# Altium PCB SE_13.PcbDoc (part 1 of 3)
Units mil, origin at the board's own origin, x right, y up, seen from the top; angles counter-clockwise.
Board outline 3937.01 x 3937.01 mil, 4 copper layers (Top, GND, PWR, Bottom), stack 35.4 mil thick; 269 components, 124 nets, 773 pads, 1135 vias.
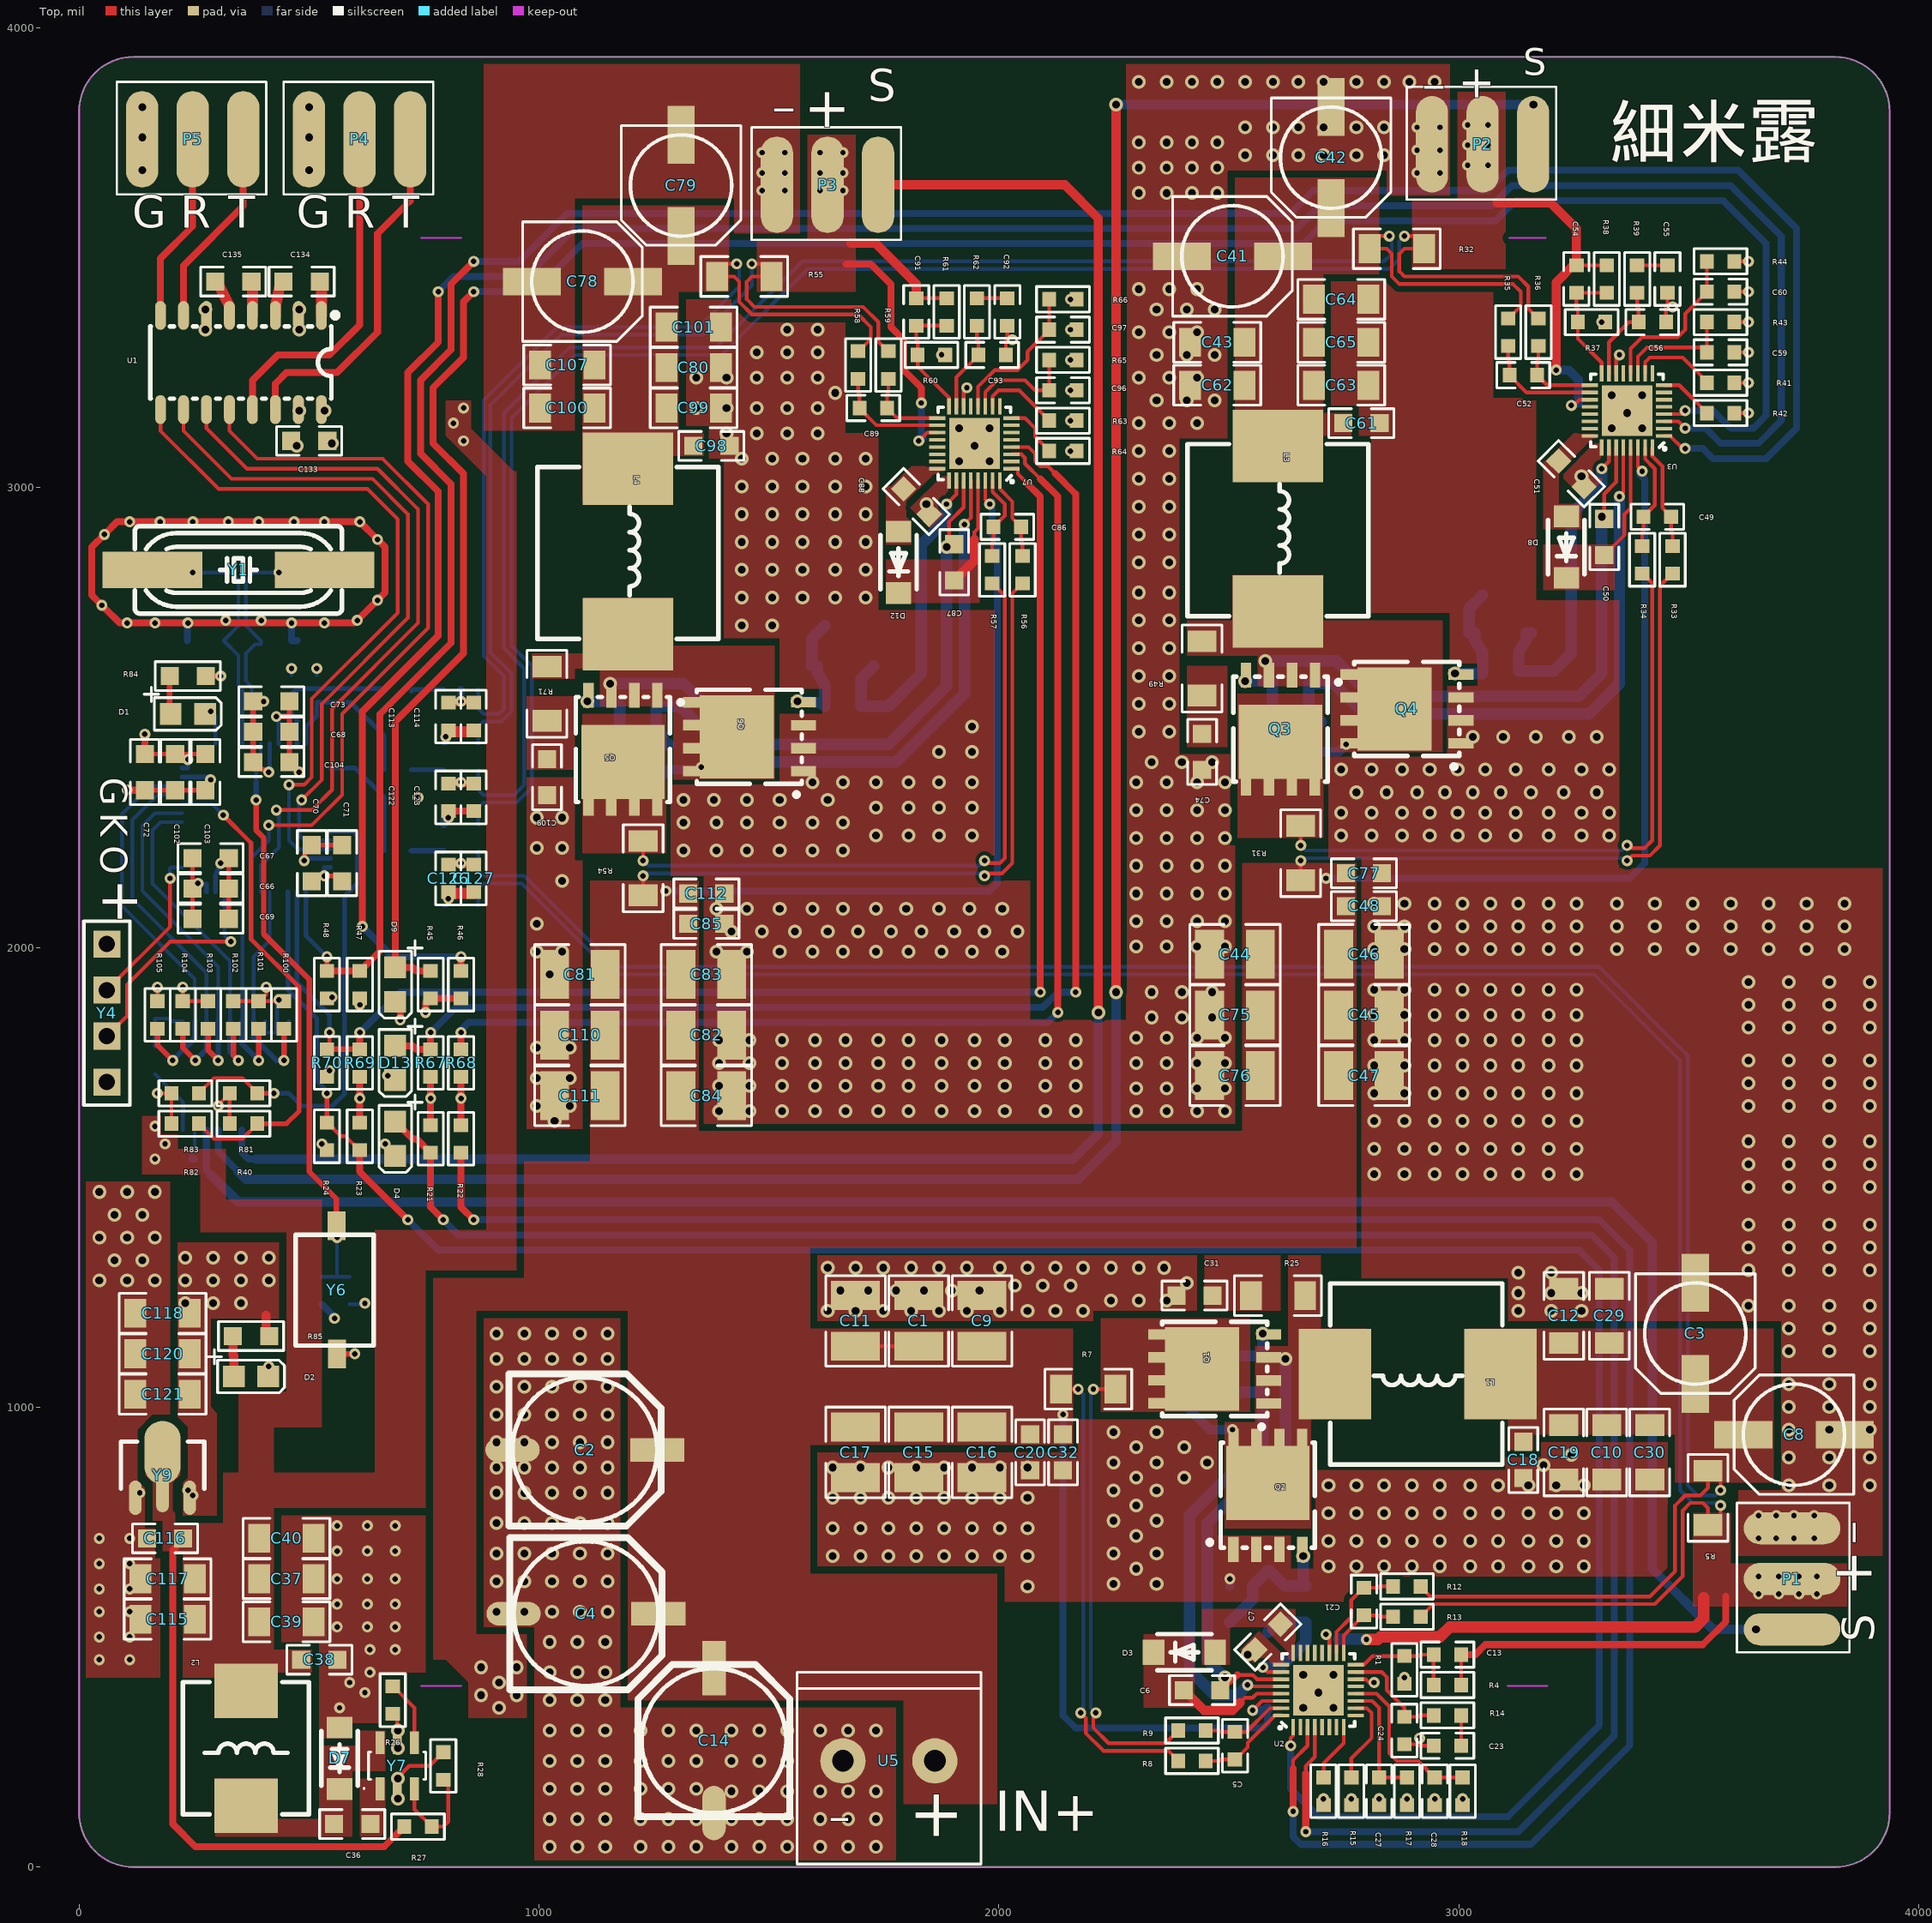
[diagram p0: Top view]
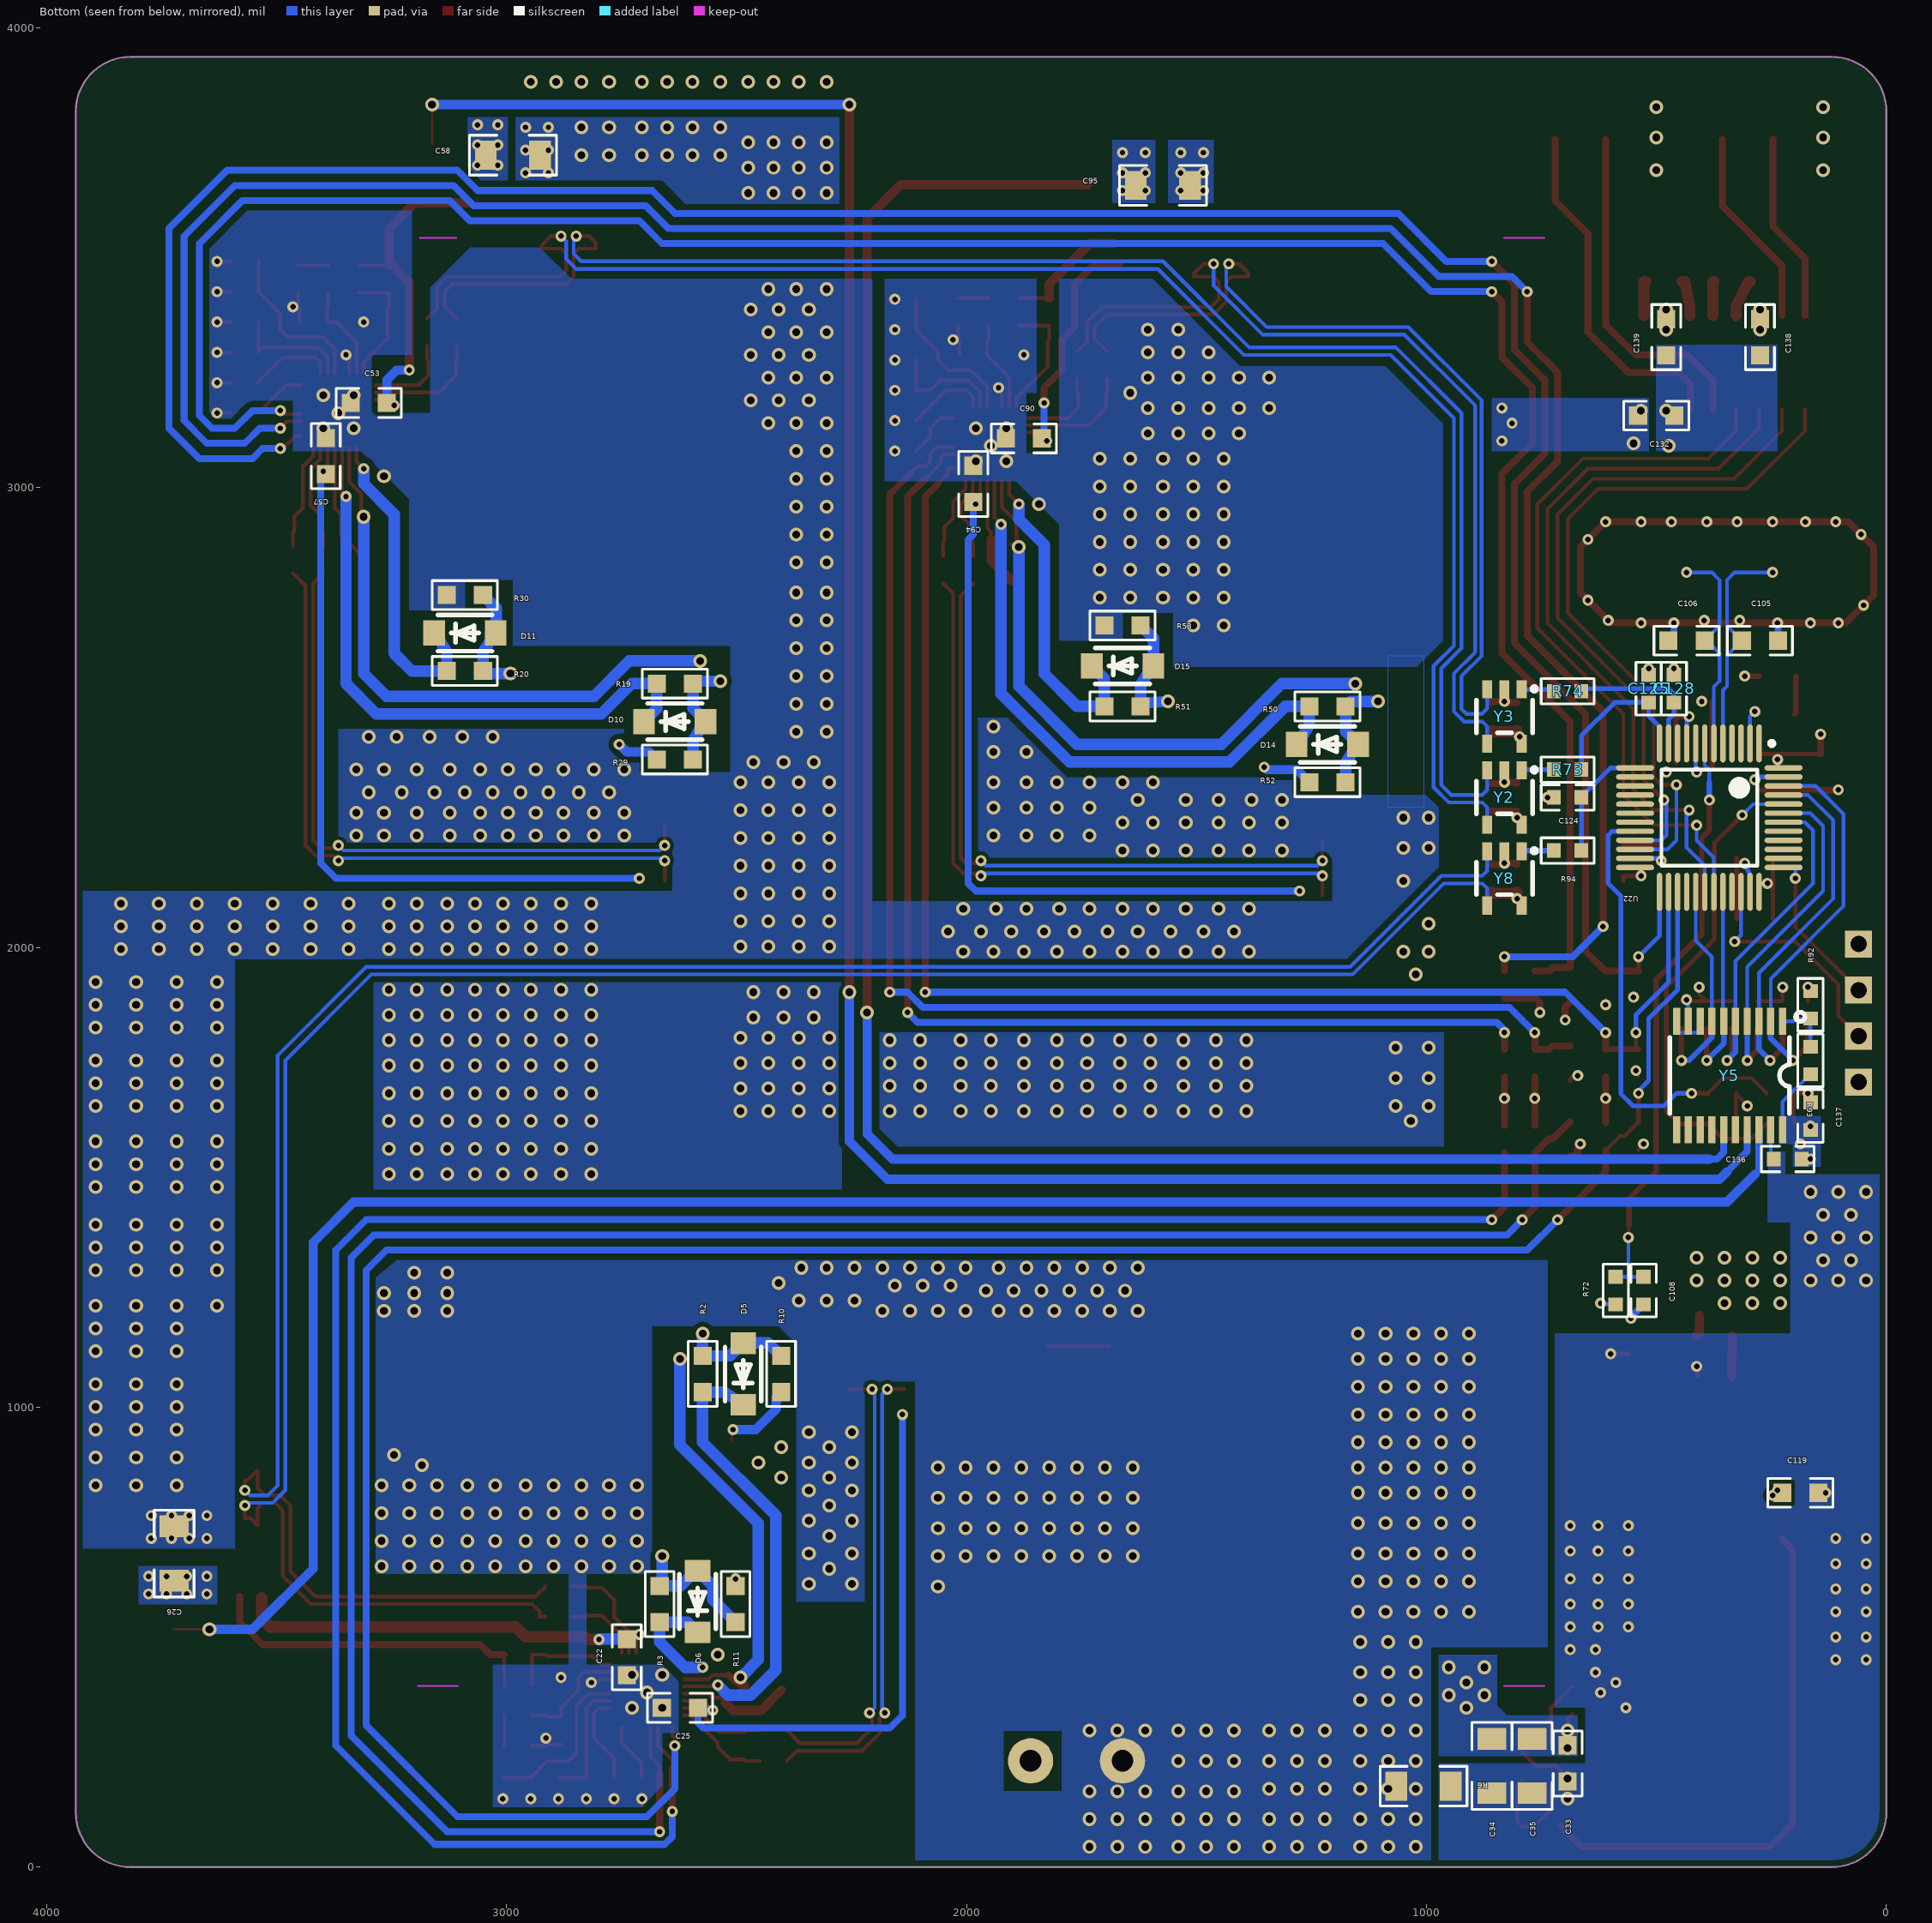
[diagram p1: Bottom view, seen from below]
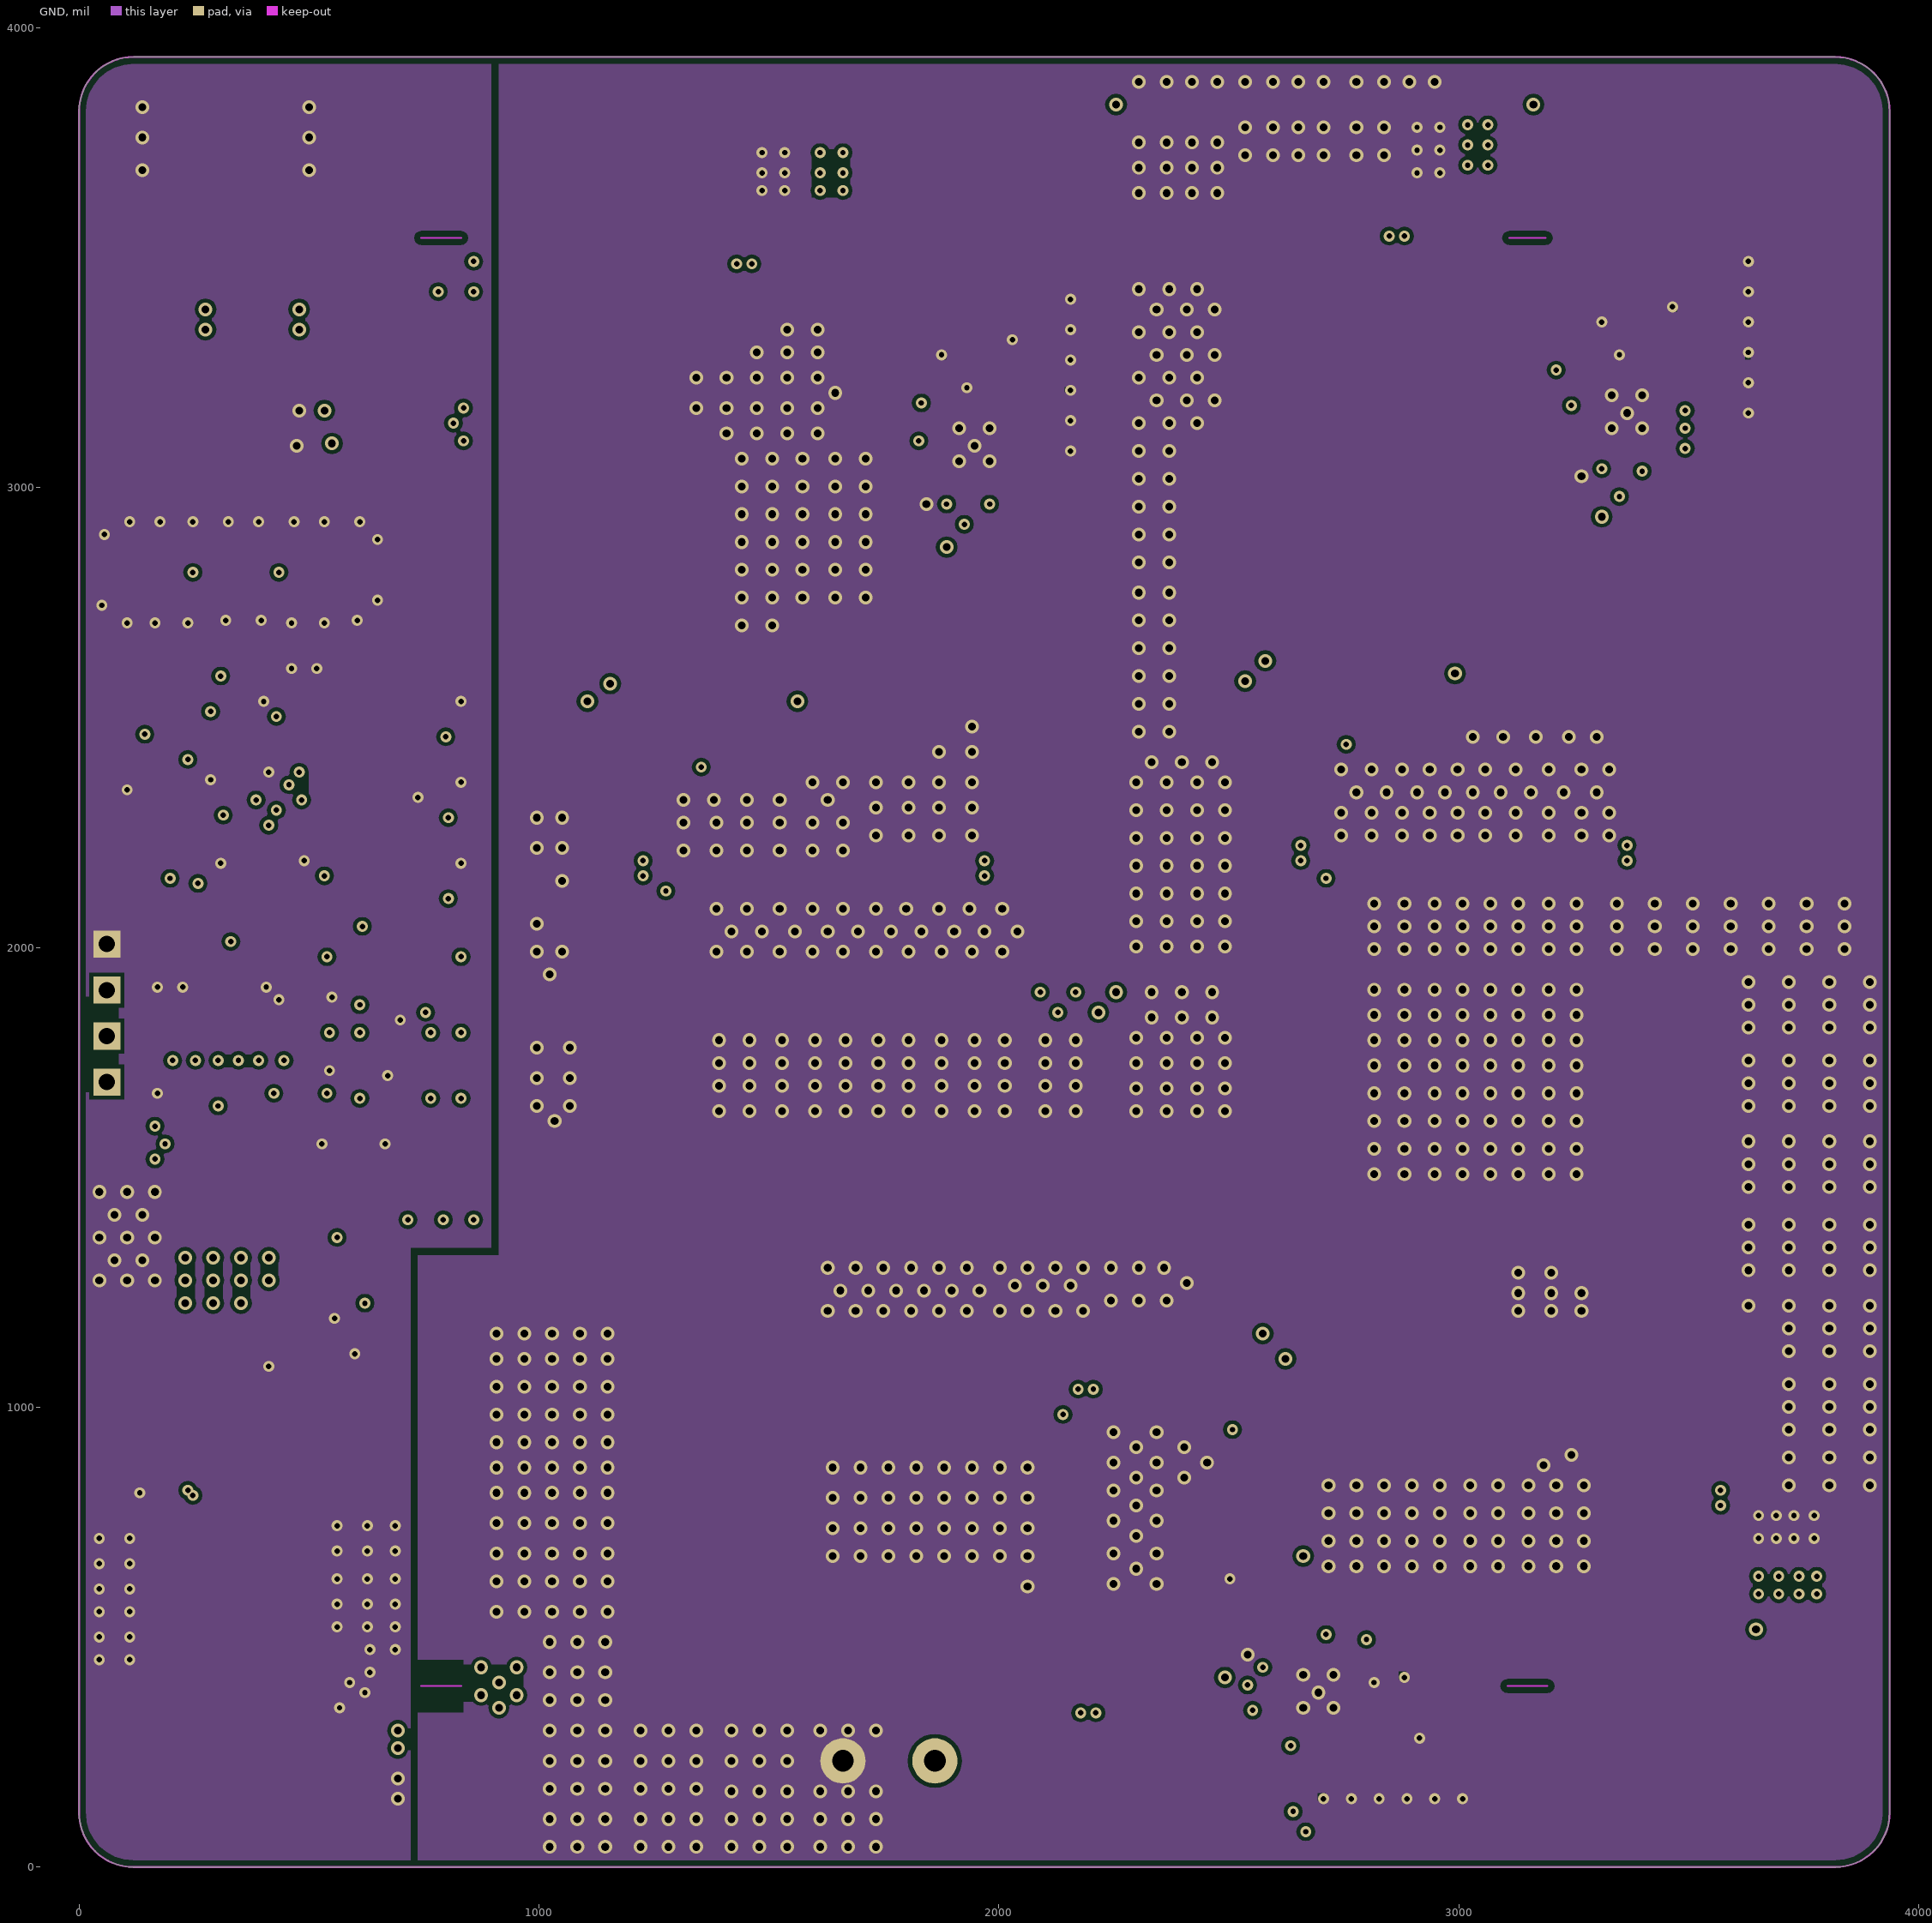
[diagram p2: GND]
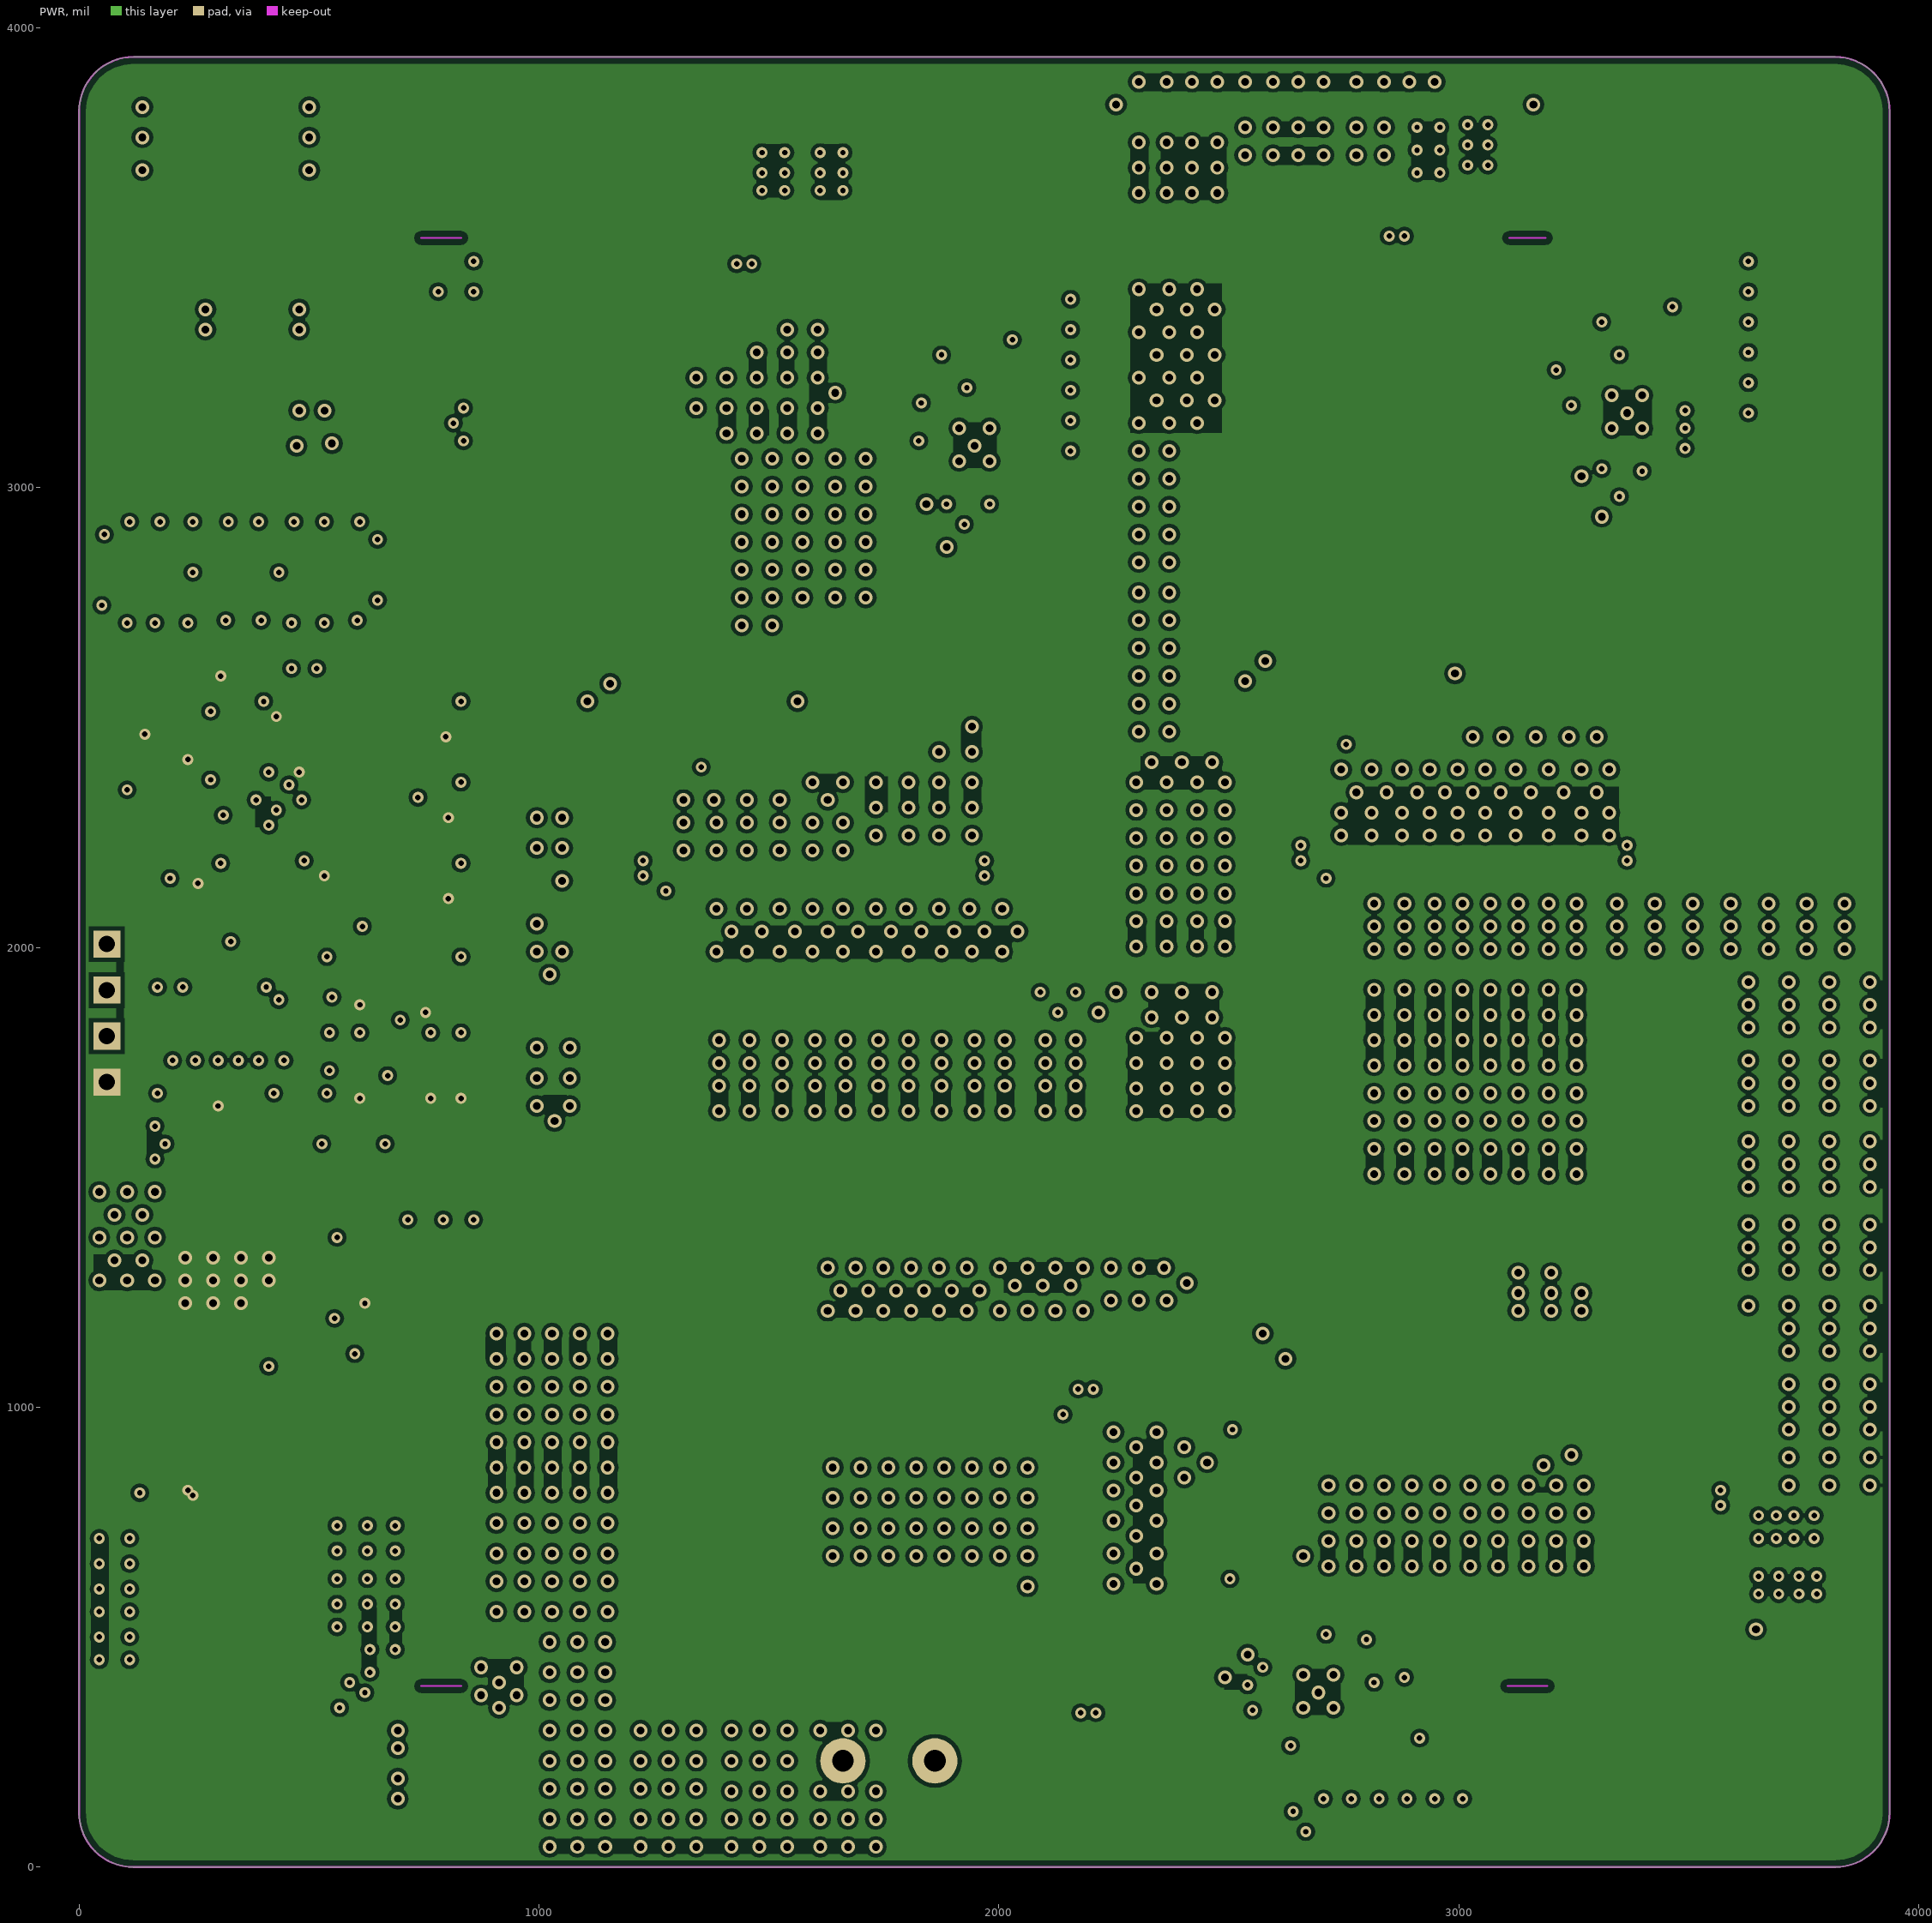
[diagram p3: PWR]

## Layer stack, top to bottom
Solder Mask Top: solder mask 0.4, Solder Resist, Dk 3.5
Top: signal copper 1.35
Dielectric 1: dielectric 10, FR-4, Dk 4.3
GND: signal copper 1.35
Dielectric2: dielectric 10, FR-4, Dk 4.3
PWR: signal copper 1.35
Dielectric3: dielectric 10, FR-4, Dk 4.3
Bottom: signal copper 1.35
Solder Mask Bottom: solder mask 0.4, Solder Resist, Dk 3.5

## Board outline
0,118.11 ccw(c118.11,118.11) 118.11,0 3818.9,0 ccw(c3818.9,118.11) 3937.01,118.11 3937.01,3818.9 ccw(c3818.9,3818.9) 3818.9,3937.01 118.11,3937.01 ccw(c118.11,3818.9) 0,3818.9

## Design rules (kind name [scope] priority, off if disabled: settings)
Clearance "Clearance - Default - DEFAULT- SMD" [IsVia vs IsSMTPin] p1: gap=0 ignorepadtopadclearanceinfootprint=TRUE
Clearance "Clearance - Default - DEFAULT - Via" [IsVia vs IsVia] p2: gap=0 ignorepadtopadclearanceinfootprint=TRUE
Clearance "Clearance - Default - DEFAULT - Net" [All] p3: gap=6 ignorepadtopadclearanceinfootprint=TRUE except(0: Arc-Hole Track-Hole SMDPad-Hole THPad-Hole Via-Hole Fill-Hole Poly-Hole Region-Hole Text-Hole; 8: SMDPad-Fill SMDPad-Poly SMDPad-Region Via-Fill Via-Poly Via-Region; 9: THPad-Fill THPad-Poly THPad-Region; 10: Fill-Fill Fill-Poly Fill-Region Poly-Poly Poly-Region Region-Region Text-Text; 13: Arc-Fill Arc-Poly Arc-Region Track-Fill Track-Poly Track-Region)
ComponentClearance "ComponentClearance - Default - DEFAULT" [All] p1: gap=0 collisioncheckmode=3 verticalgap=10 showdistances=FALSE
HoleToHoleClearance "HoleToHoleClearance - Default - DEFAULT" [All] p1: gap=0 allowstackedmicrovias=TRUE
Length "Default Length" [All] p1: maxlimit=50000 minlimit=0
MaxMinImpedance "Default Impedance" [All] p1: minimum=50.00 maximum=150.0
ParallelSegment "Default Parallel Segment Same Layer" [All] p1: limit=1000 gap=200
ParallelSegment "Default Parallel Segment Adjasent" [All] p2: limit=1000 gap=200
PlaneConnect "Default PlaneConnect" [All] p1: planeconnectstyle=Direct reliefexpansion=20 reliefentries=4 reliefconductorwidth=15 reliefairgap=10
PolygonConnect "PolygonConnect - Default SMT" [IsSMTPin] p1: connectstyle=Direct reliefconductorwidth=10 reliefentries=4 polygonreliefangle="45 Angle" airgapwidth=10
PolygonConnect "PolygonConnect - Default Pad" [All] p2: connectstyle=Direct reliefconductorwidth=15 reliefentries=4 polygonreliefangle="45 Angle" airgapwidth=10
RoutingLayers "RoutingLayers - Default - DEFAULT" [All] p1: top layer_v5=TRUE mid layer 1_v5=TRUE mid layer 2_v5=TRUE bottom layer_v5=TRUE
RoutingPriority "RoutingPriority - Default - DEFAULT" [All] p1: routingpriority=3
RoutingTopology "Default Routing Topology" [All] p1: topology=Shortest
RoutingVias "RoutingVias - Default - DEFAULT" [All] p1: holewidth=12 width=24 viastyle="Through Hole" minholewidth=12 minwidth=24 maxholewidth=12 maxwidth=24
SMDToCorner "SMDToCorner - Default - DEFAULT" [All] p1: distance=0
SolderMaskExpansion "SolderMaskExpansion from CAM settings" [All] p1: expansion=5
Width "Default Width" [All] p1: maxlimit=200 minlimit=4.1 preferedwidth=8
24 further rules are at their usual default settings.

## Components (designator, comment, footprint, x,y, rotation, side; value= is the part's Value field where it differs from the comment)
C1 "1210C" 1210C 1826,1188 r90 top
C2 "CM_E(8_10.2)" CM_E(8_10.2) 1100,907.5 r0 top
C3 "CC6.56.5" CC6.56.5 3514.5,1160.5 r90 top
C4 "CM_E(8_10.2)" CM_E(8_10.2) 1102.36,551.18 r0 top
C5 "0603C" 0603C 2513.5,264 r90 top
C6 "0805C" 0805C 2442,385 r0 top
C7 "0805C" 0805C 2585,500.5 r45 top
C8 "CC6.56.5" CC6.56.5 3729,940.5 r0 top
C9 "1210C" 1210C 1963.5,1188 r90 top
C10 "1206C" 1206C 3322,902 r270 top
C11 "1210C" 1210C 1688.5,1188 r90 top
C12 "1206C" 1206C 3228.5,1199 r90 top
C13 "0603C" 0603C 2975.5,462 r180 top
C14 "CM_E(8_10.2)" CM_E(8_10.2) 1380.5,275 r90 top
C15 "1210C" 1210C 1826,902 r270 top
C16 "1210C" 1210C 1963.5,902 r270 top
C17 "1210C" 1210C 1688.5,902 r270 top
C18 "0805C" 0805C 3140.5,885.5 r270 top
C19 "1206C" 1206C 3228.5,902 r270 top
C20 "0805C" 0805C 2068,902 r270 top
C21 "0603C" 0603C 2794,577.5 r90 top
C22 "0805C" 0805C 2739,456.5 r90 bottom
C23 "0603C" 0603C 2975.5,264 r180 top
C24 "0603C" 0603C 2882,297 r270 top
C25 "0805C" 0805C 2623.5,346.5 r180 bottom
C26 "1206C" 1206C 3723.5,682 r90 bottom
C27 "0603C" 0603C 2827,165 r270 top
C28 "0603C" 0603C 2948,165 r270 top
C29 "1206C" 1206C 3327.5,1199 r90 top
C30 "1206C" 1206C 3415.5,902 r270 top
C31 "0805C" 0805C 2425.5,1243 r180 top
C32 "0805C" 0805C 2139.5,902 r270 top
C33 "0805C" 0805C 693,225.5 r90 bottom
C34 "1206C" 1206C 858,220 r90 bottom
C35 "1206C" 1206C 770,220 r90 bottom
C36 "0805C" 0805C 594,93.5 r0 top
C37 "1206C" 1206C 451,627 r180 top
C38 "0805C" 0805C 522.5,451 r180 top
C39 "1206C" 1206C 451,533.5 r180 top
C40 "1206C" 1206C 451,715 r180 top
C41 "CC6.56.5" CC6.56.5 2508,3503.5 r180 top
C42 "CC6.56.5" CC6.56.5 2722.5,3718 r90 top
C43 "1206C" 1206C 2475,3316.5 r180 top
C44 "1210C" 1210C 2513.5,1985.5 r180 top
C45 "1210C" 1210C 2794,1853.5 r0 top
C46 "1210C" 1210C 2794,1985.5 r0 top
C47 "1210C" 1210C 2794,1721.5 r0 top
C48 "0805C" 0805C 2794,2090 r0 top
C49 "0603C" 0603C 3432,2937 r180 top
C50 "0805C" 0805C 3316.5,2893 r90 top
C51 "0805C" 0805C 3245,3030.5 r135 top
C52 "0603C" 0603C 3140.5,3245 r180 top
C53 "0805C" 0805C 3300,3184.5 r180 bottom
C54 "0603C" 0603C 3256,3454 r270 top
C55 "0603C" 0603C 3454,3454 r270 top
C56 "0603C" 0603C 3421,3360.5 r0 top
C57 "0805C" 0805C 3393.5,3069 r270 bottom
C58 "1206C" 1206C 2986.5,3723.5 r180 bottom
C59 "0603C" 0603C 3569.5,3294.5 r0 top
C60 "0603C" 0603C 3569.5,3426.5 r0 top
C61 "0805C" 0805C 2788.5,3140.5 r0 top
C62 "1206C" 1206C 2475,3223 r180 top
C63 "1206C" 1206C 2744.5,3223 r0 top
C64 "1206C" 1206C 2744.5,3410 r0 top
C65 "1206C" 1206C 2744.5,3316.5 r0 top
C66 "0805C" 0805C 286,2128.5 r0 top
C67 "0805C" 0805C 286,2194.5 r0 top
C68 "0805C" 0805C 418,2469.5 r180 top
C69 "0805C" 0805C 286,2062.5 r0 top
C70 "0805C" 0805C 506,2183.5 r90 top
C71 "0805C" 0805C 572,2183.5 r90 top
C72 "0805C" 0805C 143,2381.5 r270 top
C73 "0805C" 0805C 418,2535.5 r180 top
C74 "0805C" 0805C 2442,2425.5 r270 top
C75 "1210C" 1210C 2513.5,1853.5 r180 top
C76 "1210C" 1210C 2513.5,1721.5 r180 top
C77 "0805C" 0805C 2794,2161.5 r0 top
C78 "CC6.56.5" CC6.56.5 1094.5,3448.5 r180 top
C79 "CC6.56.5" CC6.56.5 1309,3657.5 r90 top
C80 "1206C" 1206C 1336.5,3261.5 r0 top
C81 "1210C" 1210C 1089,1941.5 r180 top
C82 "1210C" 1210C 1364,1809.5 r0 top
C83 "1210C" 1210C 1364,1941.5 r0 top
C84 "1210C" 1210C 1364,1677.5 r0 top
C85 "0805C" 0805C 1364,2051.5 r0 top
C86 "0603C" 0603C 2018.5,2915 r180 top
C87 "0805C" 0805C 1903,2838 r90 top
C88 "0805C" 0805C 1820.5,2970 r135 top
C89 "0603C" 0603C 1727,3173.5 r180 top
C90 "0805C" 0805C 1875.5,3107.5 r180 bottom
C91 "0603C" 0603C 1820.5,3382.5 r270 top
C92 "0603C" 0603C 2018.5,3382.5 r270 top
C93 "0603C" 0603C 1985.5,3289 r0 top
C94 "0805C" 0805C 1985.5,3008.5 r270 bottom
C95 "1206C" 1206C 1573,3657.5 r180 bottom
C96 "0603C" 0603C 2139.5,3212 r0 top
C97 "0603C" 0603C 2139.5,3344 r0 top
C98 "0805C" 0805C 1375,3091 r0 top
C99 "1206C" 1206C 1336.5,3173.5 r0 top
C100 "1206C" 1206C 1061.5,3173.5 r180 top
C101 "1206C" 1206C 1336.5,3349.5 r0 top
C102 "0805C" 0805C 209,2381.5 r270 top
C103 "0805C" 0805C 275,2381.5 r270 top
C104 "0805C" 0805C 418,2403.5 r180 top
C105 "0805C" 0805C 275,2667.5 r0 bottom
C106 "0805C" 0805C 434.5,2667.5 r180 bottom
C107 "1206C" 1206C 1061.5,3267 r180 top
C108 "0603C" 0603C 528,1254 r270 bottom
C109 "0805C" 0805C 1017.5,2370.5 r270 top
C110 "1210C" 1210C 1089,1809.5 r180 top
C111 "1210C" 1210C 1089,1677.5 r180 top
C112 "0805C" 0805C 1364,2117.5 r0 top
C113 "0603C" 0603C 803,2502.5 r270 top
C114 "0603C" 0603C 858,2502.5 r270 top
C115 "1206C" 1206C 192.5,539 r0 top
C116 "0805C" 0805C 187,715 r0 top
C117 "1206C" 1206C 192.5,627 r0 top
C118 "1206C" 1206C 181.5,1204.5 r0 top
C119 "0805C" 0805C 187,814 r0 bottom
C120 "1206C" 1206C 181.5,1116.5 r0 top
C121 "1206C" 1206C 181.5,1028.5 r0 top
C122 "0603C" 0603C 803,2326.5 r270 top
C123 "0603C" 0603C 858,2326.5 r270 top
C124 "0603C" 0603C 693,2326.5 r180 bottom
C125 "0603C" 0603C 517,2563 r270 bottom
C126 "0603C" 0603C 803,2150.5 r270 top
C127 "0603C" 0603C 858,2150.5 r270 top
C128 "0603C" 0603C 462,2563 r270 bottom
C132 "0805C" 0805C 500.5,3157 r180 bottom
C133 "0805C" 0805C 500.5,3102 r180 top
C134 "0805C" 0805C 484,3448.5 r180 top
C135 "0805C" 0805C 335.5,3448.5 r180 top
C136 "0603C" 0603C 214.5,1540 r180 bottom
C137 "0603C" 0603C 165,1633.5 r270 bottom
C138 "0805C" 0805C 275,3327.5 r270 bottom
C139 "0805C" 0805C 478.5,3327.5 r270 bottom
D1 "0805D" 0805D 236.5,2508 r0 top
D2 "0805D" 0805D 374,1067 r0 top
D3 "SOD-123_L2.8-W1.8-LS3.7-RD" SOD-123_L2.8-W1.8-LS3.7-RD 2403.5,467.5 r0 top
D4 "0805D" 0805D 687.5,1584 r270 top
D5 "SOD-123_L2.8-W1.8-LS3.7-RD" SOD-123_L2.8-W1.8-LS3.7-RD 2486,1072.5 r90 bottom
D6 "SOD-123_L2.8-W1.8-LS3.7-RD" SOD-123_L2.8-W1.8-LS3.7-RD 2585,577.5 r90 bottom
D7 "SOD-123_L2.8-W1.8-LS3.7-RD" SOD-123_L2.8-W1.8-LS3.7-RD 566.5,236.5 r90 top
D8 "SOD-123_L2.8-W1.8-LS3.7-RD" SOD-123_L2.8-W1.8-LS3.7-RD 3234,2871 r90 top
D9 "0805D" 0805D 687.5,1919.5 r270 top
D10 "SOD-123_L2.8-W1.8-LS3.7-RD" SOD-123_L2.8-W1.8-LS3.7-RD 2634.5,2491.5 r180 bottom
D11 "SOD-123_L2.8-W1.8-LS3.7-RD" SOD-123_L2.8-W1.8-LS3.7-RD 3091,2684 r180 bottom
D12 "SOD-123_L2.8-W1.8-LS3.7-RD" SOD-123_L2.8-W1.8-LS3.7-RD 1782,2838 r90 top
D13 "0805D" 0805D 687.5,1749 r270 top
D14 "SOD-123_L2.8-W1.8-LS3.7-RD" SOD-123_L2.8-W1.8-LS3.7-RD 1215.5,2442 r180 bottom
D15 "SOD-123_L2.8-W1.8-LS3.7-RD" SOD-123_L2.8-W1.8-LS3.7-RD 1661,2612.5 r180 bottom
L1 "1040L" 1040L 3091,1072.5 r180 top
L2 "L-SMD-0630" L-SMD-0630 363,258.5 r90 top
L3 "1040L" 1040L 2607,3091 r270 top
L4 "1040L" 1040L 1193.5,3041.5 r270 top
P1 "POST_3" POST_3 3850,797 r180 top
P2 "POST_3" POST_3 2882,3872 r270 top
P3 "POST_3" POST_3 1457.5,3784 r270 top
P4 "POST_3" POST_3 440,3883 r270 top
P5 "POST_3" POST_3 77,3883 r270 top
Q1 "DFN-8_5X6" DFN-8_5X6 2469.5,1083.5 r90 top
Q2 "DFN-8_5X6" DFN-8_5X6 2585,808.5 r0 top
Q3 "DFN-8_5X6" DFN-8_5X6 2612.5,2475 r180 top
Q4 "DFN-8_5X6" DFN-8_5X6 2887.5,2519 r90 top
Q5 "DFN-8_5X6" DFN-8_5X6 1182.5,2431 r180 top
Q6 "DFN-8_5X6" DFN-8_5X6 1457.5,2458.5 r90 top
R1 "0603R" 0603R 2882,429 r90 top
R2 "0805R" 0805R 2574,1072.5 r90 bottom
R3 "0805R" 0805R 2667.5,572 r90 bottom
R4 "0603R" 0603R 2975.5,396 r0 top
R5 "1206C" 1206C 3542,803 r270 top
R6 "1206C" 1206C 1006.5,176 r0 bottom
R7 "1206C" 1206C 2194.5,1039.5 r180 top
R8 "0603R" 0603R 2420,231 r180 top
R9 "0603R" 0603R 2420,297 r180 top
R10 "0805R" 0805R 2403.5,1072.5 r270 bottom
R11 "0805R" 0805R 2502.5,572 r270 bottom
R12 "0603R" 0603R 2887.5,610.5 r180 top
R13 "0603R" 0603R 2887.5,544.5 r180 top
R14 "0603R" 0603R 2975.5,330 r180 top
R15 "0603R" 0603R 2766.5,165 r90 top
R16 "0603R" 0603R 2706,165 r90 top
R17 "0603R" 0603R 2887.5,165 r90 top
R18 "0603R" 0603R 3008.5,165 r90 top
R19 "0805R" 0805R 2634.5,2574 r180 bottom
R20 "0805R" 0805R 3091,2601.5 r180 bottom
R21 "0603R" 0603R 764.5,1584 r90 top
R22 "0603R" 0603R 830.5,1584 r90 top
R23 "0603R" 0603R 610.5,1589.5 r90 top
R24 "0603R" 0603R 539,1589.5 r90 top
R25 "1206C" 1206C 2607,1243 r180 top
R26 "0603R" 0603R 682,363 r90 top
R27 "0603R" 0603R 737,88 r0 top
R28 "0603R" 0603R 792,220 r270 top
R29 "0805R" 0805R 2634.5,2409 r0 bottom
R30 "0805R" 0805R 3091,2766.5 r180 bottom
R31 "1206C" 1206C 2656.5,2205.5 r270 top
R32 "1206C" 1206C 2865.5,3520 r0 top
R33 "0603R" 0603R 3465,2843.5 r270 top
R34 "0603R" 0603R 3399,2843.5 r270 top
R35 "0603R" 0603R 3107.5,3338.5 r270 top
R36 "0603R" 0603R 3173.5,3338.5 r270 top
R37 "0603R" 0603R 3289,3360.5 r180 top
R38 "0603R" 0603R 3322,3454 r90 top
R39 "0603R" 0603R 3388,3454 r270 top
R40 "0603R" 0603R 357.5,1617 r180 top
R41 "0603R" 0603R 3569.5,3228.5 r180 top
R42 "0603R" 0603R 3569.5,3162.5 r180 top
R43 "0603R" 0603R 3569.5,3360.5 r180 top
R44 "0603R" 0603R 3569.5,3492.5 r180 top
R45 "0603R" 0603R 764.5,1919.5 r270 top
R46 "0603R" 0603R 830.5,1919.5 r270 top
R47 "0603R" 0603R 610.5,1919.5 r270 top
R48 "0603R" 0603R 539,1919.5 r90 top
R49 "1206C" 1206C 2442,2607 r270 top
R50 "0805R" 0805R 1215.5,2524.5 r180 bottom
R51 "0805R" 0805R 1661,2524.5 r180 bottom
R52 "0805R" 0805R 1215.5,2359.5 r0 bottom
R53 "0805R" 0805R 1661,2700.5 r180 bottom
R54 "1206C" 1206C 1226.5,2172.5 r270 top
R55 "1206C" 1206C 1446.5,3459.5 r0 top
R56 "0603R" 0603R 2051.5,2821.5 r270 top
R57 "0603R" 0603R 1985.5,2821.5 r270 top
R58 "0603R" 0603R 1694,3267 r270 top
R59 "0603R" 0603R 1760,3267 r270 top
R60 "0603R" 0603R 1853.5,3289 r180 top
R61 "0603R" 0603R 1886.5,3382.5 r90 top
R62 "0603R" 0603R 1952.5,3382.5 r270 top
R63 "0603R" 0603R 2139.5,3146 r180 top
R64 "0603R" 0603R 2139.5,3080 r180 top
R65 "0603R" 0603R 2139.5,3278 r180 top
R66 "0603R" 0603R 2139.5,3410 r180 top
R67 "0603R" 0603R 764.5,1749 r270 top
R68 "0603R" 0603R 830.5,1749 r270 top
R69 "0603R" 0603R 610.5,1749 r270 top
R70 "0603R" 0603R 539,1749 r90 top
R71 "1206C" 1206C 1017.5,2552 r270 top
R72 "0603R" 0603R 588.5,1254 r90 bottom
R73 "0603R" 0603R 693,2387 r180 bottom
R74 "0603R" 0603R 693,2557.5 r180 bottom
R81 "0603R" 0603R 357.5,1683 r180 top
R82 "0603R" 0603R 231,1617 r0 top
R83 "0603R" 0603R 231,1683 r0 top
R84 "0805R" 0805R 236.5,2590.5 r0 top
R85 "0805R" 0805R 374,1155 r0 top
R92 "0603R" 0603R 165,1875.5 r270 bottom
R93 "0603R" 0603R 165,1754.5 r90 bottom
R94 "0603R" 0603R 693,2211 r180 bottom
R100 "0603R" 0603R 445.5,1853.5 r270 top
R101 "0603R" 0603R 390.5,1853.5 r270 top
R102 "0603R" 0603R 335.5,1853.5 r270 top
R103 "0603R" 0603R 280.5,1853.5 r270 top
R104 "0603R" 0603R 225.5,1853.5 r270 top
R105 "0603R" 0603R 170.5,1853.5 r270 top
U1 "SOP-16_L9.9-W3.9-P1.27-LS6.1-BL" SOP-16_L9.9-W3.9-P1.27-LS6.1-BL 352,3272.5 r180 top
U2 "QFN-32_L4.0-W4.0-P0.40-BL-EP2.7" QFN-32_L4.0-W4.0-P0.40-BL-EP2.7 2695,385 r0 top
U3 "QFN-32_L4.0-W4.0-P0.40-BL-EP2.7" QFN-32_L4.0-W4.0-P0.40-BL-EP2.7 3366,3168 r90 top
U5 "KF127_2" KF127_2 1661,231 r0 top
U7 "QFN-32_L4.0-W4.0-P0.40-BL-EP2.7" QFN-32_L4.0-W4.0-P0.40-BL-EP2.7 1947,3096.5 r90 top
U22 "LQFP-48_M" LQFP-48_M 385,2282.5 r270 bottom
Y1 "HC-49S_L11.4-W4.8" HC-49S_L11.4-W4.8 346.5,2821.5 r180 top
Y2 "SOT-23-5_L3.0-W1.7-P0.95-LS2.8-BL" SOT-23-5_L3.0-W1.7-P0.95-LS2.8-BL 830.5,2326.5 r0 bottom
Y3 "SOT-23-5_L3.0-W1.7-P0.95-LS2.8-BL" SOT-23-5_L3.0-W1.7-P0.95-LS2.8-BL 830.5,2502.5 r0 bottom
Y4 "HDR1X4" HDR1X4 60.5,2007.5 r270 top
Y5 "TSSOP-20_L6.5-W4.4-P0.65-LS6.4-BL" TSSOP-20_L6.5-W4.4-P0.65-LS6.4-BL 341,1721.5 r0 bottom
Y6 "KEY_3_6_2.5" KEY_3_6_2.5 473,1375 r270 top
Y7 "SOT-23-6" SOT-23-6 654.5,170.5 r90 top
Y8 "SOT-23-5_L3.0-W1.7-P0.95-LS2.8-BL" SOT-23-5_L3.0-W1.7-P0.95-LS2.8-BL 830.5,2150.5 r0 bottom
Y9 "SOT-89-3_L4.5-W2.5-P1.50-LS4.2-BR" SOT-89-3_L4.5-W2.5-P1.50-LS4.2-BR 181.5,852.5 r270 top

## Footprints (in the part's own frame and the unit in brackets; to place one, negate y for a bottom-side part, rotate by r counter-clockwise, add the part's x,y. Pads: shape width x height; smd on the part's side, far side on the other; paste and mask are expansions set on the pad)
0603C [mil]
  rect 29.92x31.5 smd: 1(-29.92,0) 2(29.92,0)
  silkscreen extent -57,-28 57,28
0603R [mil]
  rect 29.92x31.5 smd: 1(-29.92,0) 2(29.92,0)
  silkscreen extent -57,-28 57,28
0805C [mm]
  rect 1x1 smd: 1(-1,0) 2(1,0)
  silkscreen extent -1.8,-0.8 1.8,0.8
0805D [mil]
  rect 47.24x47.24 smd: A(-37.4,0) K(37.4,0)
  silkscreen extent -95,-35 73,59
0805R [mm]
  rect 1x1 smd: 1(-1,0) 2(1,0)
  silkscreen extent -1.8,-0.8 1.8,0.8
1040L [mm]
  rect 4x5 smd: 1(9.144,0) 2(0,0)
  silkscreen extent -0.1,-5 9.4,5
1206C [mil]
  rect 47.24x62.99 smd: 1(-59.06,0) 2(59.06,0)
  silkscreen extent -94,-43 94,43
1210C [mm]
  rect 1.6x2.7 smd: 1(-1.4,0) 2(1.4,0)
  silkscreen extent -2.5,-1.65 2.5,1.65
CC6.56.5 [mil]
  rect 125.98x59.06 smd: 1(-110,0) 2(110.24,0)
  silkscreen extent -130,-130 130,130
CM_E(8_10.2) [mm]
  rect 3x1.3 smd: 1(4,0)
  oval 3x1.3 smd: 2(-4,0)
  silkscreen extent -4.2,-4.2 4.2,4.2
DFN-8_5X6 [mm]
  rect 0.58x1.38 smd: 1(-1.905,-2.985) 2(-0.635,-2.985) 3(0.635,-2.985) 4(1.905,-2.985) 5(1.9,2.985) 6(0.64,2.985) 7(-0.63,2.985) 8(-1.9,2.985)
  rect 4.6x4.1 smd: 9(0,0.695)
  silkscreen extent -3.2,-2.89 2.6,2.9
HC-49S_L11.4-W4.8 [mm]
  rect 5.5x2 smd: 1(-4.75,0) 2(4.75,0)
  silkscreen extent -5.71,-2.41 5.71,2.41
HDR1X4 [mil]
  rect 59.06x59.06 hole 35.43: 1(0,0) 2(100,0) 3(200,0) 4(300,0)
  silkscreen extent -50,-50 350,50
KEY_3_6_2.5 [mm]
  rect 1.6x1 smd: 1(-0.5,2.2) 2(6.578,2.232)
  silkscreen extent 0,-0.05 6.11,4.26
KF127_2 [mm]
  round 2.5 hole 1.2: 1(0,0) 2(5.08,0)
  silkscreen extent -2.54,-5.7 7.62,4.9
L-SMD-0630 [mm]
  rect 3x3.5 smd: 1(-3.175,0) 2(3.175,0)
  silkscreen extent -3.66,-3.48 3.66,3.48
LQFP-48_M [mil]
  oval 82.68x11.81 smd: 1(-161.42,108.27) 2(-161.42,88.58) 3(-161.42,68.9) 4(-161.42,49.21) 5(-161.42,29.53) 6(-161.42,9.84) 7(-161.42,-9.84) 8(-161.42,-29.53) 9(-161.42,-49.21) 10(-161.42,-68.9) 11(-161.42,-88.58) 12(-161.42,-108.27) 25(161.42,-108.27) 26(161.42,-88.58) 27(161.42,-68.9) 28(161.42,-49.21) 29(161.42,-29.53) 30(161.42,-9.84) 31(161.42,9.84) 32(161.42,29.53) 33(161.42,49.21) 34(161.42,68.9) 35(161.42,88.58) 36(161.42,108.27)
  oval 11.81x82.68 smd: 13(-108.27,-161.42) 14(-88.58,-161.42) 15(-68.9,-161.42) 16(-49.21,-161.42) 17(-29.53,-161.42) 18(-9.84,-161.42) 19(9.84,-161.42) 20(29.53,-161.42) 21(49.21,-161.42) 22(68.9,-161.42) 23(88.58,-161.42) 24(108.27,-161.42) 37(108.27,161.42) 38(88.58,161.42) 39(68.9,161.42) 40(49.21,161.42) 41(29.53,161.42) 42(9.84,161.42) 43(-9.84,161.42) 44(-29.53,161.42) 45(-49.21,161.42) 46(-68.9,161.42) 47(-88.58,161.42) 48(-108.27,161.42)
  silkscreen extent -166,-104 104,141
POST_3 [mil]
  oval 210x70 smd: 1(125,280) 2(125,170) 3(125,60)
  silkscreen extent 0,5 245,330
QFN-32_L4.0-W4.0-P0.40-BL-EP2.7 [mm]
  rect 0.2x0.9 smd: 1(-1.4,-2.05) 2(-1,-2.05) 3(-0.6,-2.05) 4(-0.2,-2.05) 5(0.2,-2.05) 6(0.6,-2.05) 7(1,-2.05) 8(1.4,-2.05) 17(1.4,2.05) 18(1,2.05) 19(0.6,2.05) 20(0.2,2.05) 21(-0.2,2.05) 22(-0.6,2.05) 23(-1,2.05) 24(-1.4,2.05)
  rect 0.9x0.2 smd: 9(2.05,-1.4) 10(2.05,-1) 11(2.05,-0.6) 12(2.05,-0.2) 13(2.05,0.2) 14(2.05,0.6) 15(2.05,1) 16(2.05,1.4) 25(-2.05,1.4) 26(-2.05,1) 27(-2.05,0.6) 28(-2.05,0.2) 29(-2.05,-0.2) 30(-2.05,-0.6) 31(-2.05,-1) 32(-2.05,-1.4)
  rect 2.8x2.8 smd: 33(0,0)
  silkscreen extent -2.17,-2.14 2,2
SOD-123_L2.8-W1.8-LS3.7-RD [mm]
  rect 1.2x1.4 smd: 1(-1.7,0) 2(1.7,0)
  silkscreen extent -1.5,-1 1.5,1
SOP-16_L9.9-W3.9-P1.27-LS6.1-BL [mm]
  oval 0.6x1.598 smd: 1(-4.445,-2.6) 2(-3.175,-2.6) 3(-1.905,-2.6) 4(-0.635,-2.6) 5(0.635,-2.6) 6(1.905,-2.6) 7(3.175,-2.6) 8(4.445,-2.6) 9(4.445,2.6) 10(3.175,2.6) 11(1.905,2.6) 12(0.635,2.6) 13(-0.635,2.6) 14(-1.905,2.6) 15(-3.175,2.6) 16(-4.445,2.6)
  silkscreen extent -5.36,-2.76 5,2
SOT-23-5_L3.0-W1.7-P0.95-LS2.8-BL [mm]
  rect 0.55x1 smd: 1(-0.95,-1.5) 2(0,-1.5) 3(0.95,-1.5) 4(0.95,1.5) 5(-0.95,1.5)
  silkscreen extent -1.78,-1.65 1.55,0.9
SOT-23-6 [mil]
  rect 50x20 smd: 1(0,0) 2(0,-37.4) 3(0,-74.8) 4(100,-74.8) 5(100,-37.4) 6(100,0)
  silkscreen extent 0,-99 80,35
SOT-89-3_L4.5-W2.5-P1.50-LS4.2-BR [mm]
  oval 1.9x0.7 smd: 1(1.25,-1.501) 3(1.25,1.501)
  oval 2.1x0.7 smd: 2(1,0)
  oval 3.5x2 smd: 4(-1.25,0)
  silkscreen extent -1.85,-2.3 0.75,2.3
TSSOP-20_L6.5-W4.4-P0.65-LS6.4-BL [mil]
  rect 15.74x58.8 smd: 1(-115.16,-118.16) 2(-89.56,-118.15) 3(-63.97,-118.15) 4(-38.38,-118.15) 5(-12.8,-118.15) 6(12.74,-118.15) 7(38.38,-118.15) 8(63.97,-118.15) 9(89.56,-118.15) 10(115.15,-118.15) 11(115.16,118.15) 12(89.57,118.15) 13(63.98,118.15) 14(38.39,118.15) 15(12.8,118.15) 16(-12.79,118.15) 17(-38.38,118.15) 18(-63.97,117.95) 19(-89.56,117.95) 20(-115.16,118.15)
  silkscreen extent -164,-138 130,83

## Via types
v1: diameter 30, hole 17, Top to Bottom, 881 vias
v2: diameter 24, hole 12, Top to Bottom, 254 vias

## Nets (pads, with @x,y where several pads share a name; then routed paths per layer and width w, separated by ;. In a path a pad name is that pad's centre, name@x,y a point inside that pad or via, vN(x,y) a via of type N, cw(c..) or ccw(c..) an arc to the next point about the centre after c; other vN are vias at no path point)
$$$4956: R92.2 R93.2 Y5.1 | length 124.5
  Bottom w8: R93.2@165,1784.42 R92.2@165,1845.58 196.4,1845.58 202.32,1839.66 Y5.1@225.84,1839.66
$$$5503: R94.1 Y8.1 | length 71.6
  Bottom w12: R94.1@722.92,2211 793.1,2211 Y8.1@793.1,2209.55
$$$12524: R73.1 Y2.1 | length 70.8
  Bottom w10: R73.1@722.92,2387 791.65,2387 Y2.1@793.1,2385.55
$$$12529: R74.1 Y3.1 | length 71.9
  Bottom w10: R74.1@722.92,2557.5 726.97,2561.55 Y3.1@793.1,2561.55
$$$19847: C5.2 R9.1 U2.31 | length 187.1
  Top w8: R9.1@2449.92,297 2479.77,297 2482.85,293.92 C5.2@2513.5,293.92 2537.92,293.92 2589.62,345.62 U2.31@2614.29,345.62
$$$19849: C5.1 R8.1 U2.32 | length 210.9
  Top w8: R8.1@2449.92,231 2480.5,231 2483.58,234.08 C5.1@2513.5,234.08 2514.29,234.08 2541,260.79 2541,270.37 2600.51,329.89 U2.32@2614.29,329.89
$$$20041: C6.1 D3.1 U2.29 | length 244.9
  Top w8: 2524.5,357.5 2535.5,368.5 2552,368.5 2560.62,377.12 U2.29@2614.29,377.12
  Top w20: C6.1@2402.63,385 2446.63,341 2508,341 2524.5,357.5
$$$22283: C21.2 R12.2 U2.18 | length 231.7
  Top w8: U2.18@2734.37,465.71 2734.37,511.5 2766.5,543.63 2766.5,580.71 2793.21,607.42 C21.2@2794,607.42 2824.65,607.42 2827.73,610.5 R12.2@2857.58,610.5
$$$22286: C21.1 R13.2 U2.17 | length 181.7
  Top w8: U2.17@2750.12,482.49 U2.17@2750.12,465.71 2750.12,503.7 C21.1@2794,547.58 2824.65,547.58 2827.73,544.5 R13.2@2857.58,544.5
$$$22620: C23.1 R14.1 | length 66
  Top w8: C23.1@3005.42,264 R14.1@3005.42,330
$$$25660: C31.1 R25.2
$$$27242: Q1.5 Q1.6 Q1.7 Q1.8 Q1.9 R7.1 R9.2 | length 1003.8
  Top w8: v2(2205.5,1039.5) R7.1@2253.56,1039.5 ; v2(2211,335.5) 2205.5,330 2205.5,302.5 2238.5,269.5 2362.58,269.5 R9.2@2390.08,297
  Bottom w8: v2(2205.5,1039.5) 2200,1034 2200,346.5 v2(2211,335.5)
$$$28569: R26.2 Y7.4 | length 142.5
  Top w8: R26.2@682,392.92 682.79,392.92 729.3,346.41 Y7.4@729.3,270.5
$$$28597: C36.2 Y7.1
$$$28599: C36.1 D7.1 L2.1 Y7.6
$$$28680: R27.2 R28.2 Y7.3 | length 234.4
  Top w8: Y7.3@729.3,170.5 729.3,125.62 R27.2@766.92,88 792,88 803,99 803,179.08 R28.2@792,190.08
$$$29538: D4.A R21.1 U2.4 | length 4875.4
  Top w8: 2667.5,203.5 2667.5,219.69 2673,225.5 2687.12,239.62 U2.4@2687.12,304.29
  Top w15: D4.A@687.5,1621.4 725.49,1583.41 734.38,1583.41 763.71,1554.08 R21.1@764.5,1554.08 764.5,1435.5 v2(792,1408) ; v2(2667.5,77) 2667.5,203.5
  Bottom w15: v2(792,1408) 825,1375 3289,1375 3338.5,1325.5 3338.5,286 3129.5,77 v2(2667.5,77)
$$$29645: D11.2 Q4.4 R20.2 R30.2 | length 258.8
  Bottom w25: v1(2992,2596) 3051.63,2596 R20.2@3051.63,2601.5 3051.63,2642.7 3035.19,2668.94 3035.19,2684 D11.2@3024.07,2684 3023.11,2684 3023.11,2737.98 R30.2@3051.63,2766.5
$$$29646: D11.1 R20.1 U3.26 | length 710
  Top w8: v2(3311,3041.5) 3326.64,3057.14 U3.26@3326.64,3087.29
  Bottom w25: D11.1@3157.93,2684 3146.81,2684 3146.81,2668.94 3130.37,2642.7 R20.1@3130.37,2601.5 3206.5,2601.5 3245,2640 3245,2942.5 3311,3008.5 v2(3311,3041.5)
$$$29647: D10.2 Q3.4 R19.2 R29.1 | length 258.8
  Bottom w25: v1(2535.5,2579.5) 2595.13,2579.5 R19.2@2595.13,2574 2595.13,2520.02 2566.61,2491.5 D10.2@2567.57,2491.5 2578.69,2491.5 2578.69,2476.44 2595.13,2450.2 R29.1@2595.13,2409
$$$29648: Q3.5 Q3.6 Q3.7 Q3.8 Q3.9 R31.1 R34.2 | length 1415.4
  Top w8: v2(2656.5,2222) R31.1@2656.5,2264.56 ; v2(3366,2222) 3371.5,2222 3377,2216.5 3404.5,2216.5 3421,2233 3421,2792.37 3399.79,2813.58 R34.2@3399,2813.58
  Bottom w8: v2(2656.5,2222) 2667.5,2211 3355,2211 v2(3366,2222)
$$$29649: C49.2 R34.1 U3.31 | length 234
  Top w8: R34.1@3399,2873.42 3399,2903.28 3402.08,2906.36 C49.2@3402.08,2937 3402.08,2937.58 3426.5,2962 3426.5,3041.5 3405.38,3062.62 U3.31@3405.38,3087.29
$$$29650: C49.1 R33.1 U3.32 | length 232.1
  Top w8: U3.32@3421.11,3087.29 3421,3087.18 3421,3069 3443,3047 3443,2956.71 3461.92,2937.79 C49.1@3461.92,2937 3461.92,2906.36 3465,2903.28 R33.1@3465,2873.42
$$$29651: D10.1 R19.1 U3.28 | length 1341.1
  Top w8: v2(3349.5,2981) 3358.12,2989.62 U3.28@3358.12,3087.29
  Bottom w25: D10.1@2701.43,2491.5 2673.87,2519.06 R19.1@2673.87,2574 2728,2574 2794,2508 3283.5,2508 3349.5,2574 v2(3349.5,2981)
$$$29652: C50.1 D8.1 U3.29 | length 257.4
  Top w8: C50.1@3316.5,2853.63 3360.5,2897.63 3360.5,2942.5 3373.88,2955.88 U3.29@3373.88,3087.29
$$$29653: C52.2 R35.2 U3.18 | length 255.6
  Top w8: R35.2@3107.5,3308.58 3107.5,3278.73 3110.58,3275.65 C52.2@3110.58,3245 3110.58,3244.21 3147.42,3207.37 U3.18@3285.29,3207.37
$$$29654: C52.1 R36.2 U3.17 | length 188.8
  Top w8: R36.2@3173.5,3308.58 3173.5,3278.73 3170.42,3275.65 C52.1@3170.42,3245 3192.3,3223.12 U3.17@3285.29,3223.12
$$$29655: C54.2 R37.2 R38.1 U3.16 | length 264.1
  Top w8: U3.16@3310.89,3248.71 3310.89,3272.62 3259.08,3324.42 R37.2@3259.08,3360.5 3259.08,3390.42 3256,3393.5 C54.2@3256,3424.08 R38.1@3322,3424.08
$$$29656: C55.1 R39.1 | length 66
  Top w8: R39.1@3388,3483.92 C55.1@3454,3483.92
$$$29657: C56.1 R39.2 U3.15 | length 215.3
  Top w8: U3.15@3326.64,3248.71 3326.64,3316.5 3370.64,3360.5 C56.1@3391.08,3360.5 3391.08,3390.42 3388,3393.5 R39.2@3388,3424.08
$$$29658: R42.2 U3.8 | length 118.4
  Top w8: U3.8@3446.71,3223.12 3479.75,3223.12 3539.58,3163.29 R42.2@3539.58,3162.5
$$$29659: R41.2 U3.10 | length 188.4
  Top w8: U3.10@3405.38,3248.71 3405.38,3273.38 3415.5,3283.5 3487,3283.5 3540.4,3230.11 3540.4,3228.5 R41.2@3539.58,3228.5
$$$29660: C59.1 R43.2 U3.11 | length 265.8
  Top w8: U3.11@3389.62,3248.71 3389.62,3285.12 3410,3305.5 3529.37,3305.5 3539.58,3295.29 C59.1@3539.58,3294.5 R43.2@3539.58,3360.5
$$$29661: C60.1 R44.2 U3.12 | length 357.5
  Top w8: U3.12@3373.88,3248.71 3373.88,3302.38 3399,3327.5 3476,3327.5 3492.5,3344 3492.5,3378.63 3539.58,3425.71 C60.1@3539.58,3426.5 R44.2@3539.58,3492.5
$$$29662: D9.A R45.1 U3.4 | length 5232.6
  Top w8: U3.4@3446.71,3160.12 3484.62,3160.12 v2(3492.5,3168)
  Top w15: R45.1@764.5,1949.42 733.67,1949.42 726.19,1956.9 D9.A@687.5,1956.9 687.5,2491.5 836,2640 836,3025 836,3030.5 770,3096.5 770,3217.5 836,3283.5 836,3404.5 v2(858,3426.5)
  Bottom w15: v2(858,3426.5) 990,3426.5 1094.5,3531 2662,3531 2711.5,3580.5 3080,3580.5 3124,3624.5 3575,3624.5 3668.5,3531 3668.5,3157 3641,3129.5 3591.5,3129.5 3553,3168 v2(3492.5,3168)
$$$29663: R46.1 U3.3 | length 5534.3
  Top w8: U3.3@3446.71,3144.38 3477.62,3144.38 v2(3492.5,3129.5)
  Top w15: v2(616,2046) 616,2513.22 781,2678.22 781,2986.5 781,2992 715,3058 715,3250.5 781,3316.5 v2(781,3426.5) ; R46.1@830.5,1949.42 v2(830.5,1980)
  Bottom w15: v2(616,2046) 682,1980 v2(830.5,1980) ; v2(781,3426.5) 814,3459.5 973.5,3459.5 1078,3564 2648.25,3564 2697.75,3613.5 3071.75,3613.5 3115.75,3657.5 3591.5,3657.5 3701.5,3547.5 3701.5,3146 3652,3096.5 3569.9,3096.5 3536.9,3129.5 v2(3492.5,3129.5)
$$$29665: C74.1 R49.2
$$$30741: D6.1 R3.1 U2.26 | length 295.5
  Top w8: v2(2574,434.5) 2584.14,424.37 U2.26@2614.29,424.37
  Bottom w25: v2(2574,434.5) 2612.5,434.5 2667.5,489.5 R3.1@2667.5,532.63 2607.06,532.63 D6.1@2585,510.57
$$$30745: D5.1 R2.1 U2.28 | length 1007
  Top w8: v2(2541,396) 2544.12,392.88 U2.28@2614.29,392.88
  Bottom w25: D5.1@2486,1005.57 2486,1016.69 2501.06,1016.69 2527.3,1033.13 R2.1@2574,1033.13 2574,924 2414.5,764.5 2414.5,429 2469.5,374 2519,374 v2(2541,396)
$$$30756: C28.1 R18.2 U2.12 | length 368.6
  Top w8: U2.12@2775.71,377.12 2821.5,377.12 2849,349.62 2849,247.5 2865.5,231 2912,231 2929.42,213.58 2929.42,212.71 2947.21,194.92 C28.1@2948,194.92 R18.2@3008.5,194.92
$$$30757: C24.1 R14.2 U2.15 | length 239.6
  Top w8: U2.15@2775.71,424.37 2832.5,424.37 2843.5,413.37 2843.5,385 2882,346.5 C24.1@2882,326.92 2912.65,326.92 2915.73,330 R14.2@2945.58,330
$$$30758: C13.2 R1.2 R4.1 U2.16 | length 244.9
  Top w8: U2.16@2775.71,440.12 2794,440.12 2812.81,458.92 R1.2@2882,458.92 2912.65,458.92 2915.73,462 C13.2@2945.58,462 R4.1@2945.58,396
$$$30759: C27.1 R17.2 U2.11 | length 269.5
  Top w8: U2.11@2775.71,361.38 2812.12,361.38 2827,346.5 C27.1@2827,194.92 R17.2@2887.5,194.92
$$$30760: R15.2 U2.10 | length 197.8
  Top w8: R15.2@2766.5,194.92 2766.5,236.5 2810.5,280.5 2810.5,335.5 2800.38,345.62 U2.10@2775.71,345.62
$$$30761: R16.2 U2.8 | length 128.1
  Top w8: R16.2@2706,194.92 2706.79,194.92 2706.79,226.17 2750.12,269.5 U2.8@2750.12,304.29
$$$30790: R22.1 U2.3 | length 4854.8
  Top w8: 2640,214.5 2640,232.62 2671.38,264 U2.3@2671.38,304.29
  Top w15: R22.1@830.5,1554.08 830.5,1435.5 v2(858,1408) ; v2(2640,121) 2640,214.5
  Bottom w15: v2(858,1408) 3305.5,1408 3371.5,1342 3371.5,264 3157,49.5 2656.5,49.5 2640,66 v2(2640,121)
$$$31334: D15.2 Q6.4 R51.2 R53.2 | length 271.1
  Bottom w25: v1(1562,2535.5) 1621.63,2531.16 R51.2@1621.63,2524.5 1621.63,2571.2 1605.19,2597.44 1605.19,2612.5 D15.2@1594.07,2612.5 1593.11,2612.5 1593.11,2671.98 R53.2@1621.63,2700.5
$$$31335: D15.1 R51.1 U7.26 | length 711.5
  Top w8: v2(1886.5,2964.5) 1907.64,2985.64 U7.26@1907.64,3015.79
  Bottom w25: D15.1@1727.93,2612.5 1700.37,2584.94 R51.1@1700.37,2524.5 1760,2524.5 1831.5,2596 1831.5,2876.5 1886.5,2931.5 v2(1886.5,2964.5)
$$$31336: D14.2 Q5.4 R50.2 R52.1 | length 268.8
  Bottom w25: v1(1105.5,2535.5) 1165.13,2535.5 R50.2@1176.13,2524.5 1176.13,2470.52 1147.61,2442 D14.2@1148.57,2442 1159.69,2442 1159.69,2426.94 1176.13,2400.7 R52.1@1176.13,2359.5
$$$31337: Q5.5 Q5.6 Q5.7 Q5.8 Q5.9 R54.1 R57.2 | length 1453.9
  Top w8: v2(1226.5,2189) R54.1@1226.5,2231.56 ; v2(1969,2189) 1974.5,2183.5 2002,2183.5 2013,2194.5 2013,2764.87 1986.29,2791.58 R57.2@1985.5,2791.58
  Bottom w8: v2(1226.5,2189) 1237.5,2178 1958,2178 v2(1969,2189)
$$$31338: C86.2 R57.1 U7.31 | length 186.8
  Top w8: R57.1@1985.5,2851.42 1985.5,2881.28 1988.58,2884.36 C86.2@1988.58,2915 2013,2939.42 2013,2964.5 1986.38,2991.12 U7.31@1986.38,3015.79
$$$31339: C86.1 R56.1 U7.32 | length 184.8
  Top w8: U7.32@2002.11,3015.79 2002.11,2997.5 2029.5,2970.12 2029.5,2933.92 C86.1@2048.42,2915 2048.42,2884.36 2051.5,2881.28 R56.1@2051.5,2851.42
$$$31340: D14.1 R50.1 U7.28 | length 1349.8
  Top w8: v2(1925,2920.5) 1939.12,2934.62 U7.28@1939.12,3015.79
  Bottom w25: D14.1@1282.43,2442 1271.31,2442 1271.31,2457.06 1254.87,2483.3 R50.1@1254.87,2524.5 1307.53,2524.5 1428.53,2403.5 1776.5,2403.5 1925,2552 v2(1925,2920.5)
$$$31341: C87.1 D12.1 U7.29 | length 245.6
  Top w8: 1947,2887.5 1947,2904 1954.88,2911.88 U7.29@1954.88,3015.79
  Top w20: C87.1@1903,2798.63 1899.82,2798.63 1903.48,2798.56 1947,2841.28 1947,2887.5
$$$31342: C89.2 R58.2 U7.18 | length 250.1
  Top w8: R58.2@1694,3237.08 1694,3207.23 1697.08,3204.15 C89.2@1697.08,3173.5 1697.08,3172.71 1733.92,3135.87 U7.18@1866.29,3135.87
$$$31343: C89.1 R59.2 U7.17 | length 183.3
  Top w8: R59.2@1760,3237.08 1760,3207.23 1756.92,3204.15 C89.1@1756.92,3173.5 1778.8,3151.62 U7.17@1866.29,3151.62
$$$31344: C91.2 R60.2 R61.1 U7.16 | length 270.9
  Top w8: R61.1@1886.5,3352.58 C91.2@1820.5,3352.58 1820.5,3322.73 1823.58,3319.65 R60.2@1823.58,3289 1823.58,3263.81 1891.89,3195.5 U7.16@1891.89,3177.21
$$$31345: C92.1 R62.1 | length 66
  Top w8: R62.1@1952.5,3412.42 C92.1@2018.5,3412.42
$$$31346: C93.1 R62.2 U7.15 | length 196.5
  Top w8: U7.15@1907.64,3177.21 1907.64,3240.27 1955.58,3288.21 C93.1@1955.58,3289 1955.58,3319.65 1952.5,3322.73 R62.2@1952.5,3352.58
$$$31347: R64.2 U7.8 | length 122.7
  Top w8: U7.8@2027.71,3151.62 2057,3151.62 2079,3129.62 2079,3111.37 2109.58,3080.79 R64.2@2109.58,3080
$$$31348: R63.2 U7.10 | length 178.1
  Top w8: U7.10@1986.38,3177.21 1986.38,3198.93 1999.45,3212 2044.37,3212 2109.58,3146.79 R63.2@2109.58,3146
$$$31349: C96.1 R65.2 U7.11 | length 255.7
  Top w8: U7.11@1970.62,3177.21 1970.62,3208.12 1996.5,3234 2057,3234 2079,3212 C96.1@2109.58,3212 R65.2@2109.58,3278
$$$31350: C97.1 R66.2 U7.12 | length 325.9
  Top w8: U7.12@1954.88,3177.21 1954.88,3219.88 1991,3256 2040.5,3256 2062.5,3278 2062.5,3296.13 2109.58,3343.21 C97.1@2109.58,3344 R66.2@2109.58,3410
$$$31351: D13.A R67.1 U7.4 | length 2829.9
  Top w8: U7.4@2027.71,3088.62 2064.88,3088.62 2079,3074.5 2079,3058 2090,3047 2106.5,3047 2123,3030.5
  Top w15: D13.A@687.5,1786.4 726.19,1786.4 733.67,1778.92 R67.1@764.5,1778.92 v2(764.5,1815) ; 2123,3030.5 2167,2986.5 v2(2167,1903)
  Bottom w15: v2(764.5,1815) 819.5,1870 2095.5,1870 2128.5,1903 v2(2167,1903)
$$$31352: R68.1 U7.3 | length 2623.9
  Top w8: U7.3@2027.71,3072.88 2049.43,3072.88 2057,3065.31 2057,3052.5 2090,3019.5
  Top w15: R68.1@830.5,1778.92 v2(830.5,1815) ; 2090,3019.5 2128.5,2981 v2(2128.5,1859)
  Bottom w15: v2(830.5,1815) 830.5,1820.5 847,1837 2106.5,1837 v2(2128.5,1859)
$$$31354: C109.1 R71.2
$$$31573: D2.A R85.1 | length 88.8
  Top w20: R85.1@334.63,1155 334.63,1113.95 336.6,1111.98 D2.A@336.6,1067
$$$31575: D1.A R84.1 | length 83.3
  Top w12: R84.1@197.13,2590.5 197.13,2509.97 D1.A@199.1,2508
$$$31674: D5.2 Q1.4 R2.2 R10.1 | length 243.7
  Bottom w25: R10.1@2403.5,1111.87 2432.02,1140.39 D5.2@2486,1140.39 ; D5.2@2486,1139.43 D5.2@2486,1140.39 ; v1(2574,1160.5) R2.2@2574,1111.87 2514.52,1111.87 D5.2@2486,1140.39
$$$31675: D6.2 Q2.4 R3.2 R11.2 | length 312.8
  Bottom w25: R11.2@2502.5,532.63 2552,582.13 2552,611.43 D6.2@2585,644.43 2588.94,644.43 2622,611.37 R3.2@2667.5,611.37 2662,611.37 v1(2662,676.5)
ADC_IN1: C128.2 R74.2 U22.11 | length 321.3
  Bottom w10: U22.11@473.58,2443.92 473.58,2496.42 462,2508 C128.2@462,2533.08 462.79,2533.08 462.79,2552.79 473,2563 657.58,2563 R74.2@663.08,2557.5
ADC_IN2: C125.2 R73.2 U22.12 | length 348.9
  Bottom w10: U22.12@493.27,2443.92 493.27,2480.5 517,2504.23 C125.2@517,2533.08 590.92,2533.08 663.08,2460.92 R73.2@663.08,2387
ADC_IN3: C124.2 R94.2 U22.13 | length 259.2
  Bottom w10: U22.13@546.42,2390.77 599.6,2390.77 663.08,2327.29 C124.2@663.08,2326.5 R94.2@663.08,2211
AGND: C33.1 C34.1 C35.1 C37.1 C38.1 C39.1 C40.1 C66.2 C67.2 C68.2 C69.2 C70.2 C71.2 C72.2 C73.2 C102.2 C103.2 C104.2 C105.1 C106.1 C108.2 C113.1 C114.1 C115.1 C116.1 C117.1 C118.1 C119.1 C120.1 C121.1 C122.1 C123.1 C124.1 C125.1 C126.1 C127.1 C128.1 C132.2 C133.2 C136.1 C137.1 C138.2 C139.2 D2.K D4.K D7.2 D9.K D13.K P4.3 P5.3 R6.1 R24.1 R28.1 R48.1 R70.1 R82.1 R83.1 R92.1 R100.1 R101.1 R102.1 R103.1 R104.1 R105.1 U1.15 U22.8 U22.23 U22.35 U22.47 Y2.2 Y3.2 Y4.1 Y5.8 Y5.9 Y5.10 Y5.19 Y6.2 Y7.2 Y8.2 Y9.1 | length 3844.8
  Top w4.1: v2(434.5,1886.5) 442.42,1886.5 R100.1@445.5,1883.42 ; R70.1@539,1719.08 539,1727 v2(544.5,1732.5) ; R48.1@539,1889.58 541.42,1892 v2(550,1892)
  Top w8: v2(170.5,1683) R83.1@201.08,1683 R82.1@201.08,1617 ; R105.1@170.5,1883.42 v2(170.5,1914) ; v2(225.5,1914) R104.1@225.5,1883.42 R103.1@280.5,1883.42 ; R102.1@335.5,1883.42 R101.1@390.5,1883.42 ; v2(407,1914) 407,1897.5 401.5,1892 399.08,1892 R101.1@390.5,1883.42 ; D2.K@411.4,1067 411.4,1087.9 v2(412.5,1089) ; R100.1@445.5,1883.42 R101.1@390.5,1883.42 ; v2(528,1573) 539,1562 R24.1@539,1559.58 ; v1(693,192.5) 691.75,193.75 718,220 762.08,220 R28.1@792,249.92
  Top w10: C72.2@143,2342.13 C102.2@209,2342.13 C103.2@275,2342.13 ; C69.2@325.37,2062.5 C66.2@325.37,2128.5 C67.2@325.37,2194.5 ; v2(489.5,2189) 491.32,2208.19 491.32,2222.87 C70.2@506,2222.87 C71.2@572,2222.87
  Top w12: C73.2@378.63,2535.5 C68.2@378.63,2469.5 C104.2@378.63,2403.5 378.63,2389.82 392.32,2389.82 v2(412.5,2381.5) ; Y6.2@560.87,1116.02 599.02,1116.02 v2(599.5,1116.5) ; v2(671,1721.5) 677.6,1721.5 D13.K@687.5,1711.6
  Top w15: v2(104.5,2343) 105.37,2342.13 C72.2@143,2342.13 ; v2(319,2711.5) v2@313.5,2706 ; v2(396,2711.5) v2@401.5,2706 ; v2(665.5,1573) 671.38,1562.72 671.38,1546.6 D4.K@687.5,1546.6 ; D9.K@687.5,1882.1 698.5,1871.1 v2(698.5,1842.5) ; C126.1@803,2180.42 803,2183.5 v2(830.5,2183.5) 833.58,2180.42 C127.1@858,2180.42 ; C122.1@803,2356.42 803,2359.5 v2(830.5,2359.5) 833.58,2356.42 C123.1@858,2356.42 ; C113.1@803,2532.42 827.42,2532.42 v2(830.5,2535.5) 858,2535.5 C114.1@858,2532.42 ; v2@313.5,2706 v2@401.5,2706 ; v2@313.5,2706 v2(236.5,2706) 176,2706 v2(165,2706) 126.5,2706 v2(104.5,2706) 88,2706 55,2739 v2(49.5,2744.5) 27.5,2766.5 27.5,2871 v2(55,2898.5) 82.5,2926 v2(110,2926) v2(176,2926) 242,2926 v2(247.5,2926) v2(324.5,2926) v2(390.5,2926) v2(467.5,2926) 528,2926 v2(533.5,2926) v2(610.5,2926) v2(649,2887.5) 665.5,2871 665.5,2772 654.5,2761 v2(649,2755.5) v2(605,2711.5) 599.5,2706 v2(533.5,2706) 467.5,2706 v2(462,2706) v2@401.5,2706
  Bottom w8: C136.1@244.42,1540 244.42,1549.48 251.44,1556.5 Y5.19@251.44,1603.55 ; Y5.8@404.97,1839.65 404.97,1815 429,1815 429,1838.09 Y5.9@430.56,1839.65 ; v2(434.5,1886.5) 430.56,1882.56 Y5.9@430.56,1839.65 ; Y5.10@456.15,1839.65 456.5,1839.3 456.5,1815 430.56,1815 Y5.9@430.56,1839.65 ; C128.1@462,2592.92 v2(462,2607) ; C125.1@517,2592.92 v2(517,2607) ; v2(830.5,2183.5) Y8.2@830.5,2209.55 ; v2(830.5,2359.5) Y2.2@830.5,2385.55
  Bottom w10: U22.47@223.58,2371.08 279.92,2371.08 v2(286,2365) ; U22.35@296.42,2121.08 296.42,2156.52 v2(308,2183.5) ; v2(412.5,2381.5) 414.53,2394.92 U22.8@414.53,2443.92 ; v2(489.5,2189) 499.68,2193.92 U22.23@546.42,2193.92
  Bottom w12: C106.1@473,2667.5 C106.1@473.87,2667.5
  Bottom w15: C105.1@235.63,2667.5 235.63,2705.13 v2(236.5,2706) ; C136.1@244.42,1540 C136.1@251.44,1540 ; v2(462,2706) 462,2667.5 C106.1@473.87,2667.5 ; C108.2@528,1224.08 555.5,1196.58 v2(555.5,1193.5) ; v2(830.5,2535.5) Y3.2@830.5,2561.55
  other v1: 693,148.5 44,1276 104.5,1276 165,1276 77,1320 137.5,1320 44,1369.5 104.5,1369.5 165,1369.5 77,1419 137.5,1419 44,1468.5 104.5,1468.5 165,1468.5 473,3091 478.5,3168 137.5,3690.5 500.5,3690.5 137.5,3762 500.5,3762 137.5,3828 500.5,3828
  other v2: 566.5,346.5 621.5,379.5 588.5,401.5 632.5,423.5 44,451 110,451 632.5,473 687.5,473 44,500.5 110,500.5 561,522.5 627,522.5 687.5,522.5 44,555.5 110,555.5 561,572 627,572 687.5,572 44,605 110,605 561,627 627,627 687.5,627 44,660 110,660 561,687.5 627,687.5 687.5,687.5 44,715 110,715 561,742.5 627,742.5 687.5,742.5 132,814 737,2326.5 401.5,2535.5
BOOT0: R40.1 R82.2 U22.44 | length 1069
  Top w8: R82.2@260.92,1617 260.92,1616.21 293.13,1584 355.21,1584 387.42,1616.21 R40.1@387.42,1617
  Top w10: v2(313.5,2288) 374,2227.5 374,2018.5 478.5,1914 478.5,1644.5 451,1617 R40.1@387.42,1617
  Bottom w8: U22.44@223.58,2312.03 289.47,2312.03 v2(313.5,2288)
BOOT1: R81.1 R83.2 U22.20 | length 1002.9
  Top w8: R83.2@260.92,1683 260.92,1683.79 293.13,1716 355.21,1716 387.42,1683.79 R81.1@387.42,1683
  Top w10: R81.1@387.42,1683 v2(423.5,1683)
  Bottom w10: v2(423.5,1683) 456.5,1683 484,1655.5 551,1655.5 577.5,1682 577.5,2112 605,2139.5 605,2244 596.03,2252.97 U22.20@546.42,2252.97
C1+: C134.1 U1.1 | length 77.3
  Top w24: C134.1@523.37,3448.5 527,3448.5 U1.1@527,3374.87
C1-: C134.2 U1.3 | length 80.9
  Top w24: U1.3@427,3374.87 427,3394.51 438.6,3448.5 C134.2@444.63,3448.5
C2+: C135.1 U1.4 | length 75.8
  Top w24: C135.1@374.87,3448.5 377,3448.5 U1.4@377,3374.87
C2-: C135.2 U1.5 | length 83.9
  Top w24: C135.2@296.13,3448.5 299.97,3448.5 327,3394.51 U1.5@327,3374.87
CE_1: R23.1 R24.2 U2.1 U22.27 | length 5368.3
  Top w8: R24.2@539,1619.42 539.79,1619.42 569.71,1589.5 579.79,1589.5 609.71,1559.58 R23.1@610.5,1559.58 ; v2(2634.5,264) 2634.5,280.5 2640,286 2640,304.17 U2.1@2639.88,304.29
  Top w10: R24.2@539,1619.42 v2(539,1683)
  Top w15: R23.1@610.5,1559.58 610.5,1512.5 v2(715,1408)
  Bottom w10: U22.27@453.9,2121.08 453.9,1908.5 517,1845.4 517,1710.5 539,1688.5 v2(539,1683)
  Bottom w15: v2(715,1408) 781,1342 3261.5,1342 3305.5,1298 3305.5,308 3107.5,110 2695,110 2634.5,170.5 v2(2634.5,264)
CE_2: R47.1 R48.2 U3.1 U22.25 | length 5743.8
  Top w8: U3.1@3446.71,3112.88 3459.62,3112.88 3487,3085.5 v2(3492.5,3085.5)
  Top w10: R48.2@539,1949.42 v2(539,1980)
  Top w15: R48.2@539,1949.42 R47.1@610.5,1949.42 611.29,1949.42 654.5,1992.63 654.5,2508 808.5,2662 808.5,3008.5 742.5,3074.5 742.5,3234 808.5,3300 808.5,3443 v2(858,3492.5)
  Bottom w10: U22.25@493.27,2121.08 493.27,2025.73 v2(539,1980)
  Bottom w15: v2(858,3492.5) 957,3492.5 1061.5,3597 2634.5,3597 2684,3646.5 3063.5,3646.5 3107.5,3690.5 3608,3690.5 3734.5,3564 3734.5,3129.5 3668.5,3063.5 3553,3063.5 3531,3085.5 v2(3492.5,3085.5)
CE_3: R69.1 R70.2 U7.1 U22.26 | length 3181
  Top w8: R70.2@539,1778.92 544.5,1778.92 v2(544.5,1815) ; U7.1@2035.12,3041.38 U7.1@2027.71,3041.38 2041.49,3041.38 2041.49,3030.17 2062.5,3009.16 2062.5,3008.5
  Top w10: R70.2@538.21,1778.92 R70.2@539,1778.92
  Top w12: R70.2@539,1778.92 R69.1@610.5,1778.92
  Top w15: R69.1@610.5,1778.92 v2(610.5,1815) ; 2062.5,3008.5 2090,2981 v2(2090,1903)
  Bottom w10: U22.26@473.58,2121.08 473.58,1925 544.5,1854.08 v2(544.5,1815)
  Bottom w15: v2(610.5,1815) 698.5,1903 v2(2090,1903)
DOUT1: P4.1 U1.14 | length 773.7
  Top w15: U1.14@427,3170.14 427,3226.5 451,3250.5 561,3250.5 649,3338.5 649,3553 720,3624 P4.1@720,3758
DOUT2: P5.1 U1.7 | length 437
  Top w15: U1.7@227,3374.87 227,3483 357,3613 P5.1@357,3758